# Altium PCB arm_v4.PcbDoc (part 1 of 2)
Units mil, origin at the board's own origin, x right, y up, seen from the top; angles counter-clockwise.
Board outline 3620 x 3150 mil, 4 copper layers (Top Layer, Power, GND, Bottom Layer), stack 38.234 mil thick; 65 components, 41 nets, 261 pads, 50 vias.
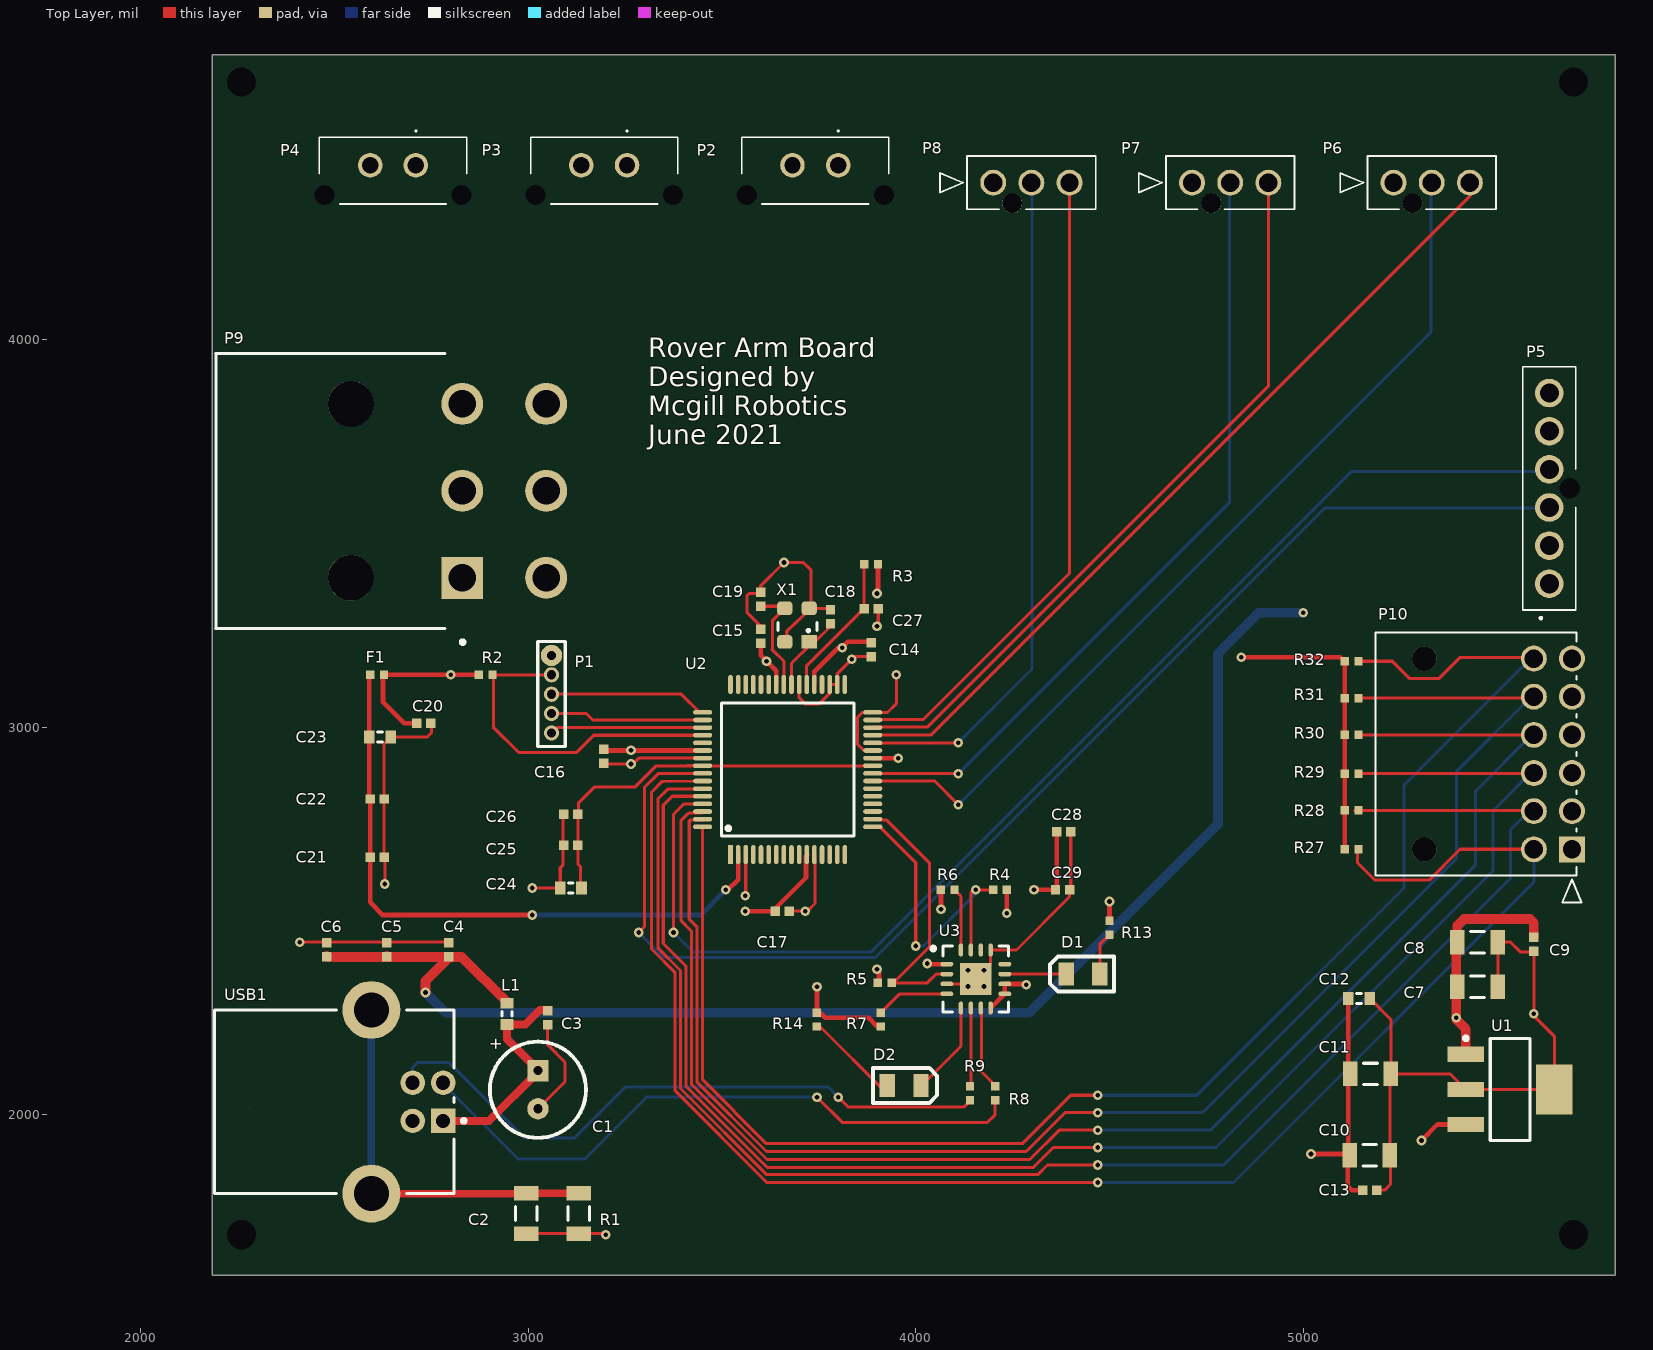
[diagram p0: Top Layer view]
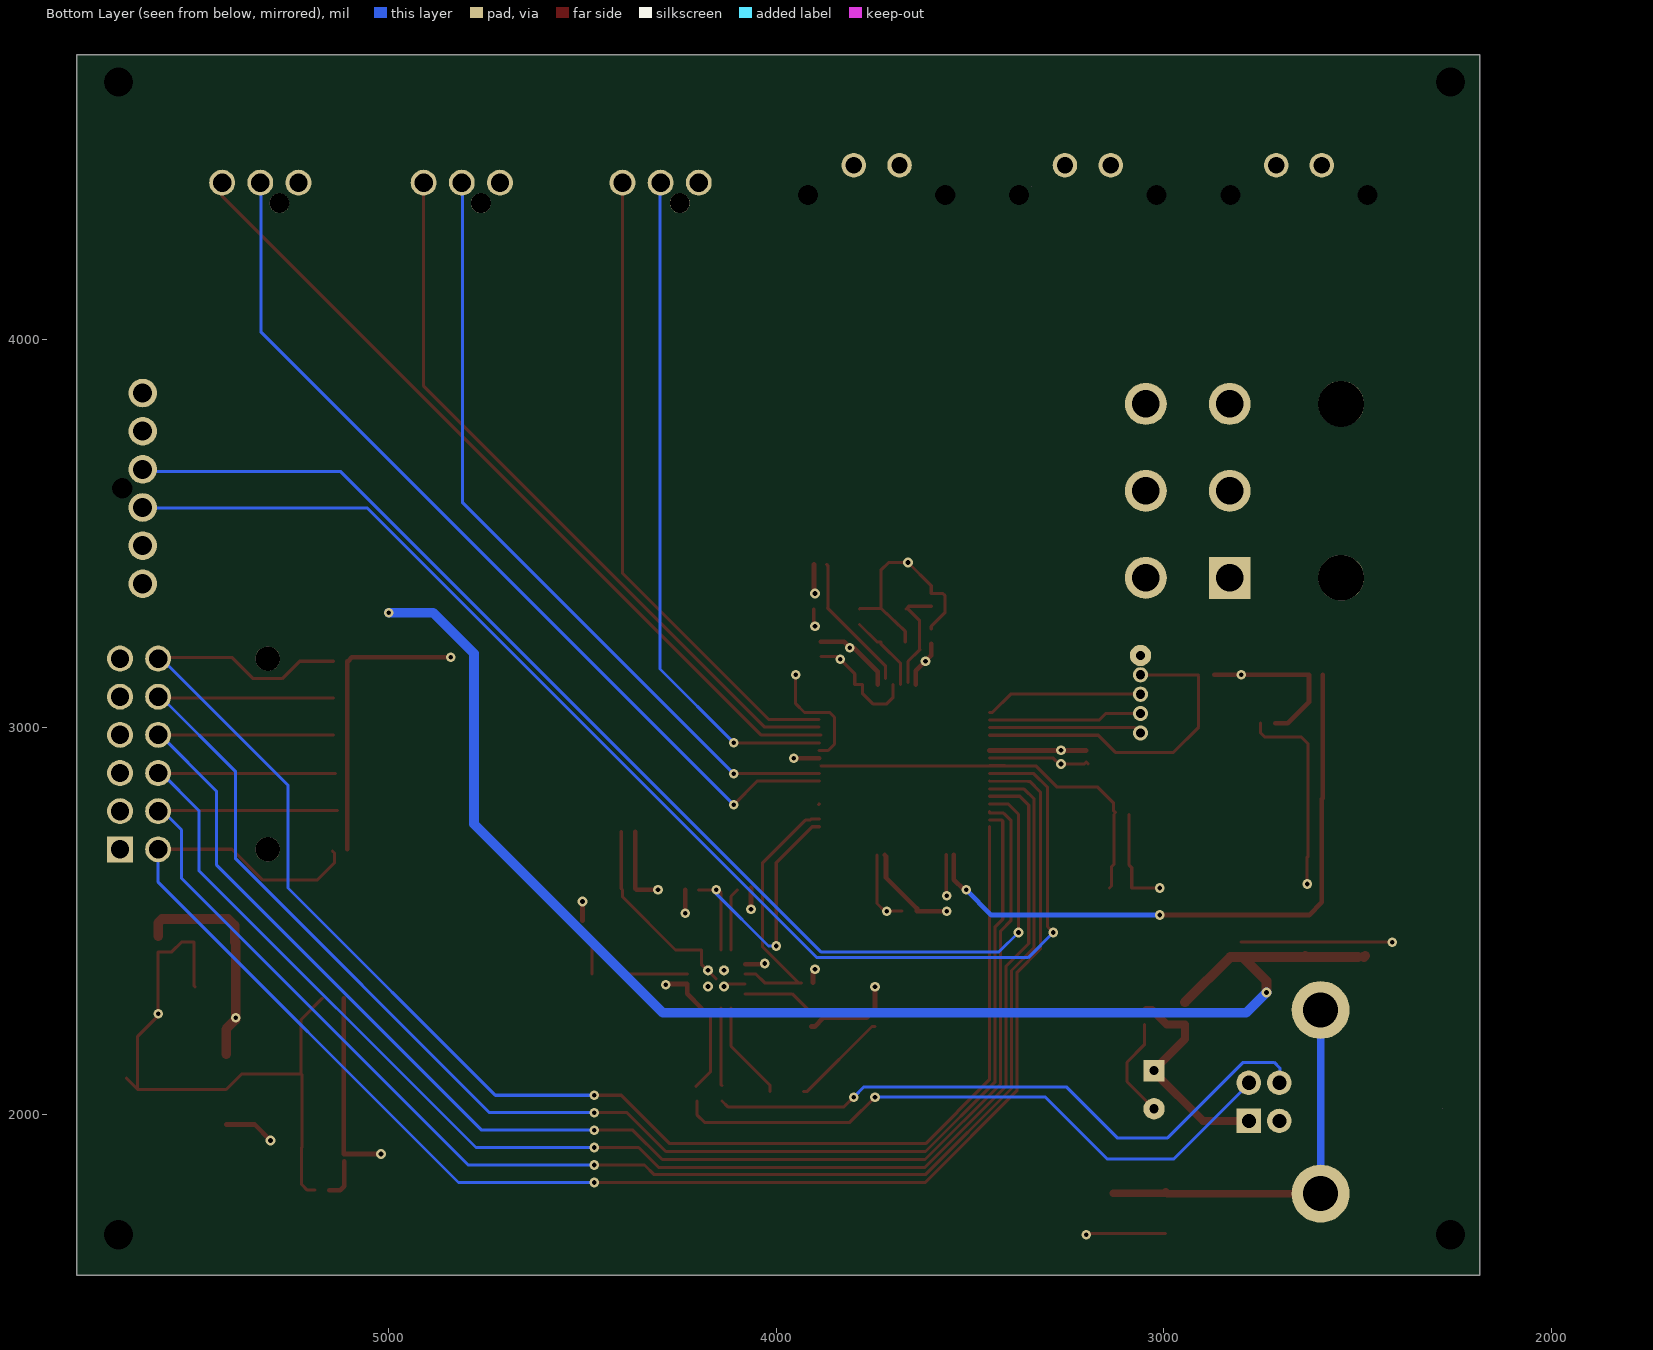
[diagram p1: Bottom Layer view, seen from below]
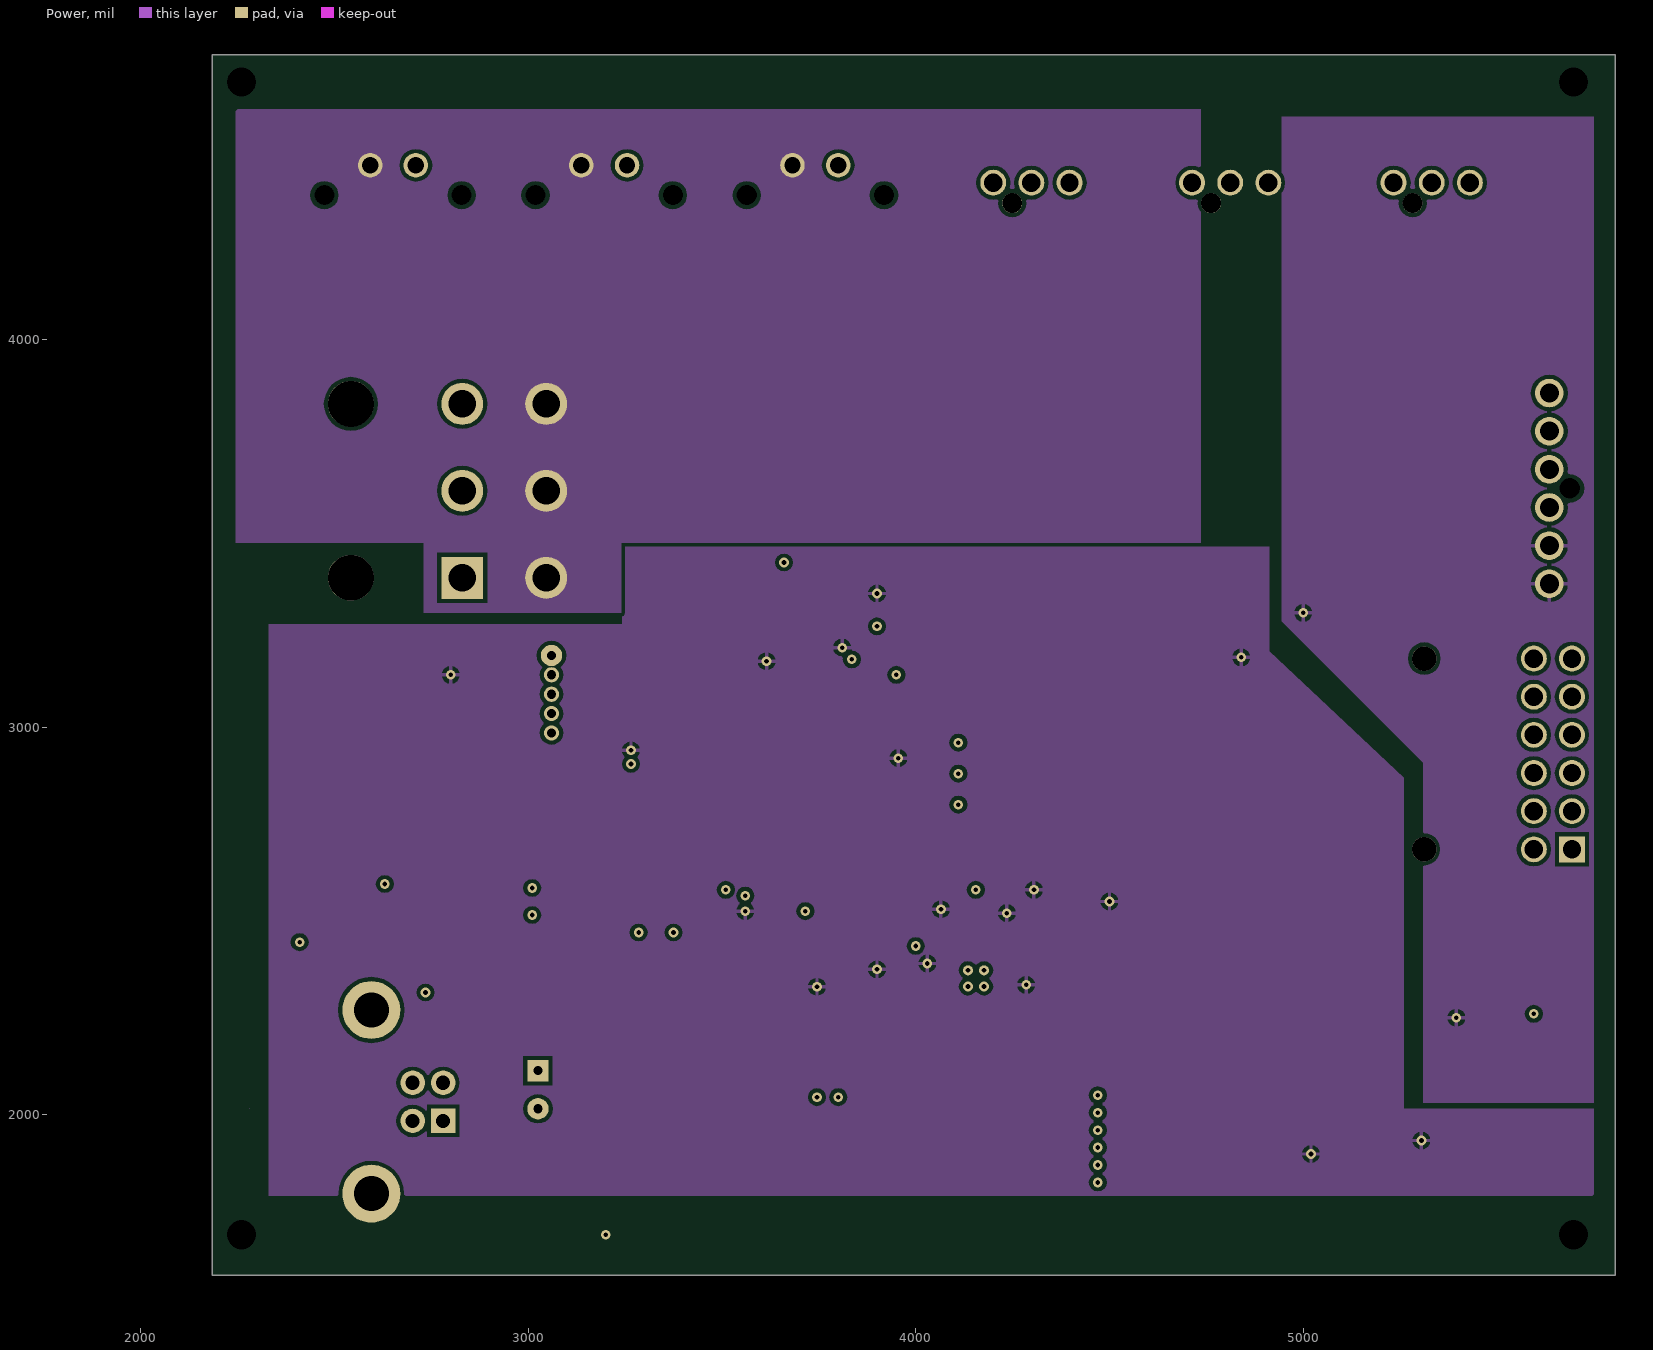
[diagram p2: Power]
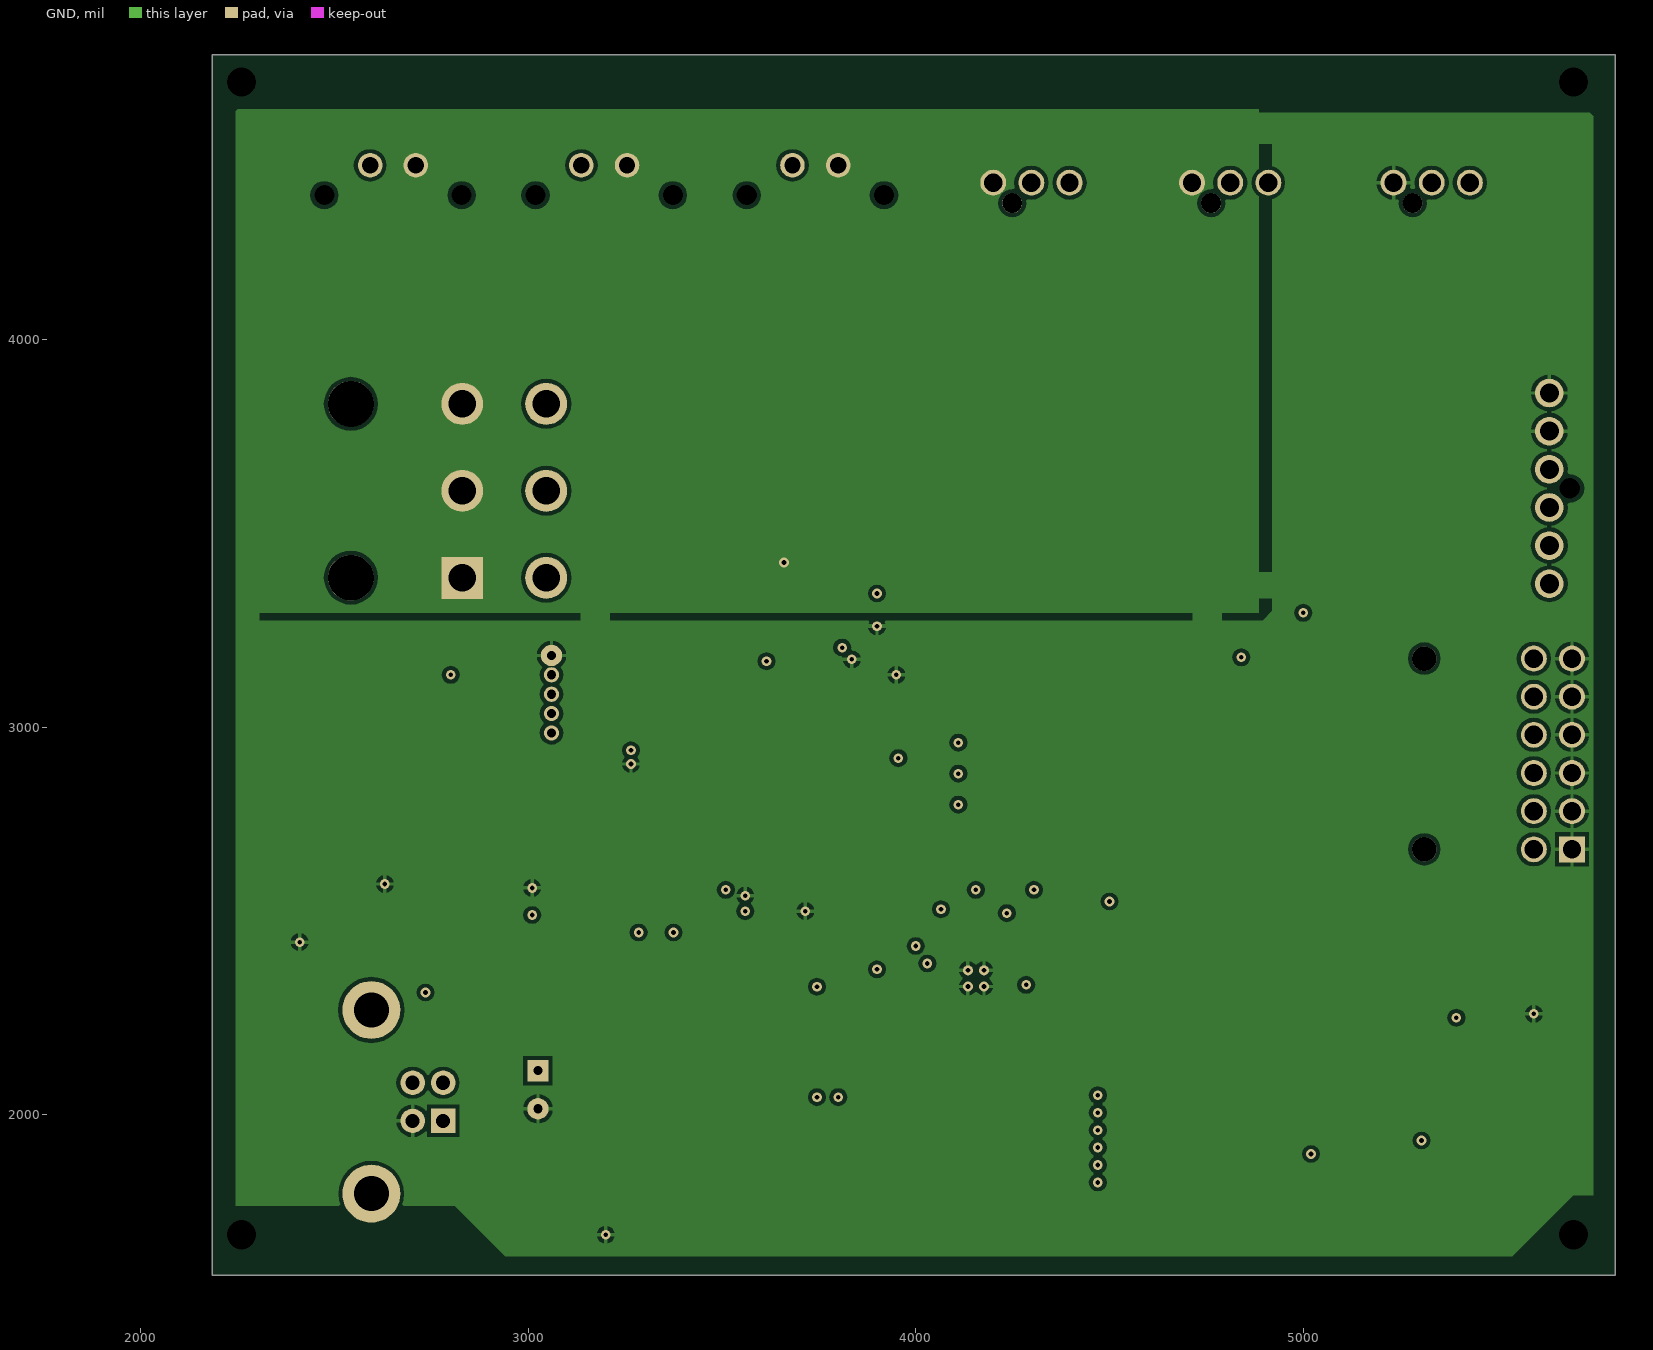
[diagram p3: GND]
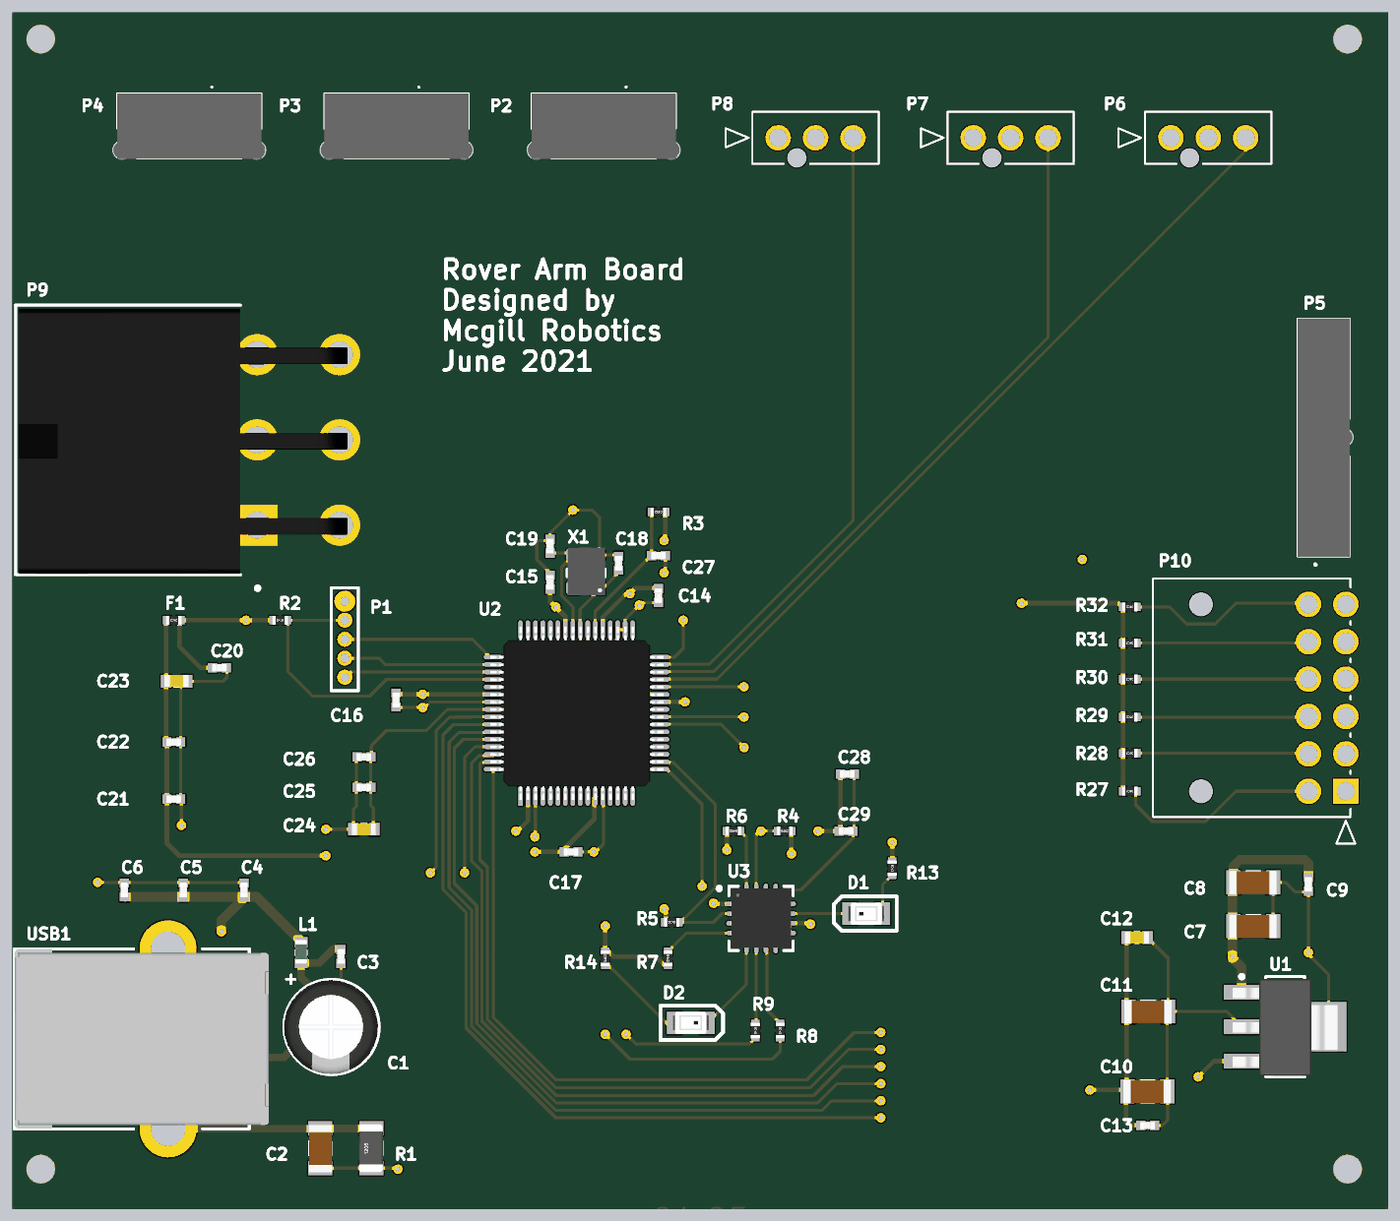
[diagram p4: 3D render of the assembled board from above, using the file's embedded part models]

## Layer stack, top to bottom
Top Solder: solder mask 0.4, Solder Resist, Dk 3.5
Top Layer: signal copper 1.4
Dielectric 2: dielectric 10, Dk 4.2
Power: signal copper 1.417
Dielectric 3: dielectric 10, Dk 4.2
GND: signal copper 1.417
Dielectric 1: dielectric 12.6, FR-4, Dk 4.8
Bottom Layer: signal copper 1.4
Bottom Solder: solder mask 0.4, Solder Resist, Dk 3.5

## Board outline
2185,4735 5805,4735 5805,1585 2185,1585
cut-out: 2280,2015
cut-out: 3340,4395

## Design rules (kind name [scope] priority, off if disabled: settings)
Clearance Clearance_7 [InNamedPolygon('OUT1_A')] p1: gap=0 ignorepadtopadclearanceinfootprint=TRUE
Clearance Clearance_6 [InNamedPolygon('OUT2_A')] p2: gap=0 ignorepadtopadclearanceinfootprint=TRUE
Clearance Clearance_5 [InNamedPolygon('OUT1_C')] p3: gap=0 ignorepadtopadclearanceinfootprint=TRUE
Clearance Clearance_4 [InNamedPolygon('OUT1_C')] p4: gap=10 ignorepadtopadclearanceinfootprint=TRUE except(0: Arc-Arc Arc-Track Arc-SMDPad Arc-THPad Arc-Via Arc-Hole Track-Track Track-SMDPad Track-THPad Track-Via Track-Hole SMDPad-Hole THPad-Hole Via-Hole Fill-Hole Poly-Hole Region-Hole Text-Hole)
Clearance Clearance_3 [InNamedPolygon('OUT2_C')] p5: gap=0 ignorepadtopadclearanceinfootprint=TRUE
Clearance Clearance_2 [InNamedPolygon('OUT2_C')] p6: gap=6 ignorepadtopadclearanceinfootprint=TRUE except(0: Arc-Hole Track-Hole SMDPad-Hole THPad-Hole Via-Hole Fill-Hole Poly-Hole Region-Hole Text-Hole)
Clearance Clearance_1 [InNamedPolygon('OUT2_C')] p7: gap=10 ignorepadtopadclearanceinfootprint=TRUE except(0: Arc-Hole Track-Hole SMDPad-Hole THPad-Hole Via-Hole Fill-Hole Poly-Hole Region-Hole Text-Hole; 6: Arc-SMDPad Track-SMDPad)
Clearance [All] p8: gap=10 ignorepadtopadclearanceinfootprint=TRUE except(0: Arc-Hole Track-Hole SMDPad-Hole THPad-Hole Via-Hole Fill-Hole Poly-Hole Region-Hole Text-Hole; 6: Arc-Arc Arc-Track Arc-SMDPad Arc-THPad Track-Track Track-SMDPad Track-THPad SMDPad-SMDPad SMDPad-THPad THPad-THPad)
HoleSize [All] p1: absolutevalues=TRUE maxlimit=150 minlimit=1 maxpercent=80.000 minpercent=20.000
MinimumSolderMaskSliver [All] p1: minsoldermaskwidth=0
PolygonConnect PolygonConnect_27 [All vs IsNamedPolygon('OUT2_B')] p1: connectstyle=Direct reliefconductorwidth=10 reliefentries=4 polygonreliefangle="90 Angle" airgapwidth=10
PolygonConnect PolygonConnect_26 [All vs IsNamedPolygon('OUT1_B')] p2: connectstyle=Direct reliefconductorwidth=10 reliefentries=4 polygonreliefangle="90 Angle" airgapwidth=10
PolygonConnect PolygonConnect_25 [All vs IsNamedPolygon('OUT1_A')] p3: connectstyle=Direct reliefconductorwidth=10 reliefentries=4 polygonreliefangle="90 Angle" airgapwidth=10
PolygonConnect PolygonConnect_24 [All vs IsNamedPolygon('OUT2_A')] p4: connectstyle=Direct reliefconductorwidth=10 reliefentries=4 polygonreliefangle="90 Angle" airgapwidth=10
PolygonConnect PolygonConnect_23 [All vs IsNamedPolygon('OUT1_C')] p5: connectstyle=Direct reliefconductorwidth=10 reliefentries=4 polygonreliefangle="90 Angle" airgapwidth=10
PolygonConnect PolygonConnect_22 [All vs IsNamedPolygon('OUT2_C')] p6: connectstyle=Direct reliefconductorwidth=10 reliefentries=4 polygonreliefangle="90 Angle" airgapwidth=10
PolygonConnect PolygonConnect_21 [All vs IsNamedPolygon('OUT2_C')] p7: connectstyle=Direct reliefconductorwidth=10 reliefentries=4 polygonreliefangle="90 Angle" airgapwidth=10
PolygonConnect PolygonConnect_20 [All vs IsNamedPolygon('Bottom Layer-OUT2_B 1')] p8: connectstyle=Direct reliefconductorwidth=10 reliefentries=4 polygonreliefangle="90 Angle" airgapwidth=10
PolygonConnect PolygonConnect_19 [All vs IsNamedPolygon('OUT2_C')] p9: connectstyle=Direct reliefconductorwidth=10 reliefentries=4 polygonreliefangle="90 Angle" airgapwidth=10
PolygonConnect PolygonConnect_18 [All vs IsNamedPolygon('OUT1_C')] p10: connectstyle=Direct reliefconductorwidth=10 reliefentries=4 polygonreliefangle="90 Angle" airgapwidth=10
PolygonConnect PolygonConnect_17 [All vs IsNamedPolygon('OUT2_B')] p11: connectstyle=Direct reliefconductorwidth=10 reliefentries=4 polygonreliefangle="90 Angle" airgapwidth=10
PolygonConnect PolygonConnect_16 [All vs IsNamedPolygon('OUT1_B')] p12: connectstyle=Direct reliefconductorwidth=10 reliefentries=4 polygonreliefangle="90 Angle" airgapwidth=10
PolygonConnect PolygonConnect_15 [All vs IsNamedPolygon('OUT1_B')] p13: thpad.connectstyle=Direct thpad.reliefconductorwidth=10 thpad.reliefentries=4 thpad.polygonreliefangle="90 Angle" thpad.airgapwidth=10 smdpad.connectstyle=Relief smdpad.reliefconductorwidth=10 smdpad.reliefentries=4 smdpad.polygonreliefangle="90 Angle" smdpad.airgapwidth=10 via.connectstyle=Direct via.reliefconductorwidth=10 via.reliefentries=4 via.polygonreliefangle="90 Angle" via.airgapwidth=10
PolygonConnect PolygonConnect_14 [All vs IsNamedPolygon('OUT1_B')] p14: thpad.connectstyle=Relief thpad.reliefconductorwidth=10 thpad.reliefentries=4 thpad.polygonreliefangle="90 Angle" thpad.airgapwidth=10 smdpad.connectstyle=Direct smdpad.reliefconductorwidth=10 smdpad.reliefentries=4 smdpad.polygonreliefangle="90 Angle" smdpad.airgapwidth=10 via.connectstyle=Relief via.reliefconductorwidth=10 via.reliefentries=4 via.polygonreliefangle="90 Angle" via.airgapwidth=10
PolygonConnect PolygonConnect_13 [All vs IsNamedPolygon('Power +24V')] p15: connectstyle=Direct reliefconductorwidth=10 reliefentries=4 polygonreliefangle="90 Angle" airgapwidth=10
PolygonConnect PolygonConnect_12 [All vs IsNamedPolygon('Power +3.3V')] p16: connectstyle=Relief reliefconductorwidth=10 reliefentries=4 polygonreliefangle="90 Angle" airgapwidth=10
PolygonConnect PolygonConnect_11 [All vs IsNamedPolygon('Power +5V')] p17: connectstyle=Relief reliefconductorwidth=10 reliefentries=4 polygonreliefangle="90 Angle" airgapwidth=10
PolygonConnect PolygonConnect_10 [All vs IsNamedPolygon('GND +24V')] p18: connectstyle=Direct reliefconductorwidth=10 reliefentries=4 polygonreliefangle="90 Angle" airgapwidth=10
PolygonConnect PolygonConnect_9 [All vs IsNamedPolygon('GND Main')] p19: connectstyle=Relief reliefconductorwidth=10 reliefentries=4 polygonreliefangle="90 Angle" airgapwidth=10
PolygonConnect PolygonConnect_8 [All vs IsNamedPolygon('GND Main')] p20: connectstyle=Relief reliefconductorwidth=10 reliefentries=4 polygonreliefangle="90 Angle" airgapwidth=10
PolygonConnect PolygonConnect_7 [All vs IsNamedPolygon('GND +24V')] p21: connectstyle=Direct reliefconductorwidth=10 reliefentries=4 polygonreliefangle="90 Angle" airgapwidth=10
PolygonConnect PolygonConnect_6 [All vs IsNamedPolygon('Power +5V')] p22: connectstyle=Relief reliefconductorwidth=10 reliefentries=4 polygonreliefangle="90 Angle" airgapwidth=10
PolygonConnect PolygonConnect_5 [All vs IsNamedPolygon('GND Main')] p23: connectstyle=Relief reliefconductorwidth=10 reliefentries=4 polygonreliefangle="90 Angle" airgapwidth=10
PolygonConnect PolygonConnect_4 [All vs IsNamedPolygon('GND +24V')] p24: connectstyle=Direct reliefconductorwidth=10 reliefentries=4 polygonreliefangle="90 Angle" airgapwidth=10
PolygonConnect PolygonConnect_3 [All vs IsNamedPolygon('GND +24V')] p25: connectstyle=Direct reliefconductorwidth=10 reliefentries=4 polygonreliefangle="90 Angle" airgapwidth=10
PolygonConnect PolygonConnect_2 [All vs IsNamedPolygon('GND Main')] p26: connectstyle=Direct reliefconductorwidth=10 reliefentries=4 polygonreliefangle="90 Angle" airgapwidth=10
PolygonConnect PolygonConnect_1 [All vs IsNamedPolygon('Power +24V')] p27: connectstyle=Direct reliefconductorwidth=10 reliefentries=4 polygonreliefangle="90 Angle" airgapwidth=10
PolygonConnect [All] p28: connectstyle=Relief reliefconductorwidth=10 reliefentries=4 polygonreliefangle="90 Angle" airgapwidth=10
RoutingVias [All] p1: holewidth=28 width=50 viastyle="Through Hole" minholewidth=10 minwidth=25 maxholewidth=50 maxwidth=150
SilkToSilkClearance [All] p1: silktosilkclearance=0
SilkToSolderMaskClearance [IsPad] p1: minsilkscreentomaskgap=0 clearancetoexposedcopper=TRUE
SolderMaskExpansion [All] p1: expansion=4
Width [All] p1: maxlimit=100 minlimit=6 preferedwidth=10 toplayer_prefwidth=8 midlayer1_minwidth=10 midlayer1_maxwidth=10 midlayer2_minwidth=10 midlayer2_maxwidth=10 bottomlayer_prefwidth=8 minimp=50.000000 maximp=50.000000 favimp=50.000000
26 further rules are at their usual default settings.

## Components (designator, comment, footprint, x,y, rotation, side; value= is the part's Value field where it differs from the comment)
C1 "100uF" CapAlu6.3mmx12.5mm 3025,2064.21 r90 top
C2 "10nF" CAP_1206 2995,1745 r90 top
C3 "10nF" CAP_0402_M 3050,2250 r90 top
C4 "100nF" CAP_0402_M 2795,2425 r270 top
C5 "2.2uF" CAP_0402_M 2635,2425 r270 top
C6 "2.2uF" CAP_0402_M 2480,2425 r270 top
C7 "100uF" CAP_1206 5450,2330 r0 top
C8 "100uF" CAP_1206 5450,2445 r0 top
C9 "1uF" CAP_0402_M 5595,2440 r90 top
C10 "100uF" CAP_1206 5171.65,1895 r0 top
C11 "100uF" CAP_1206 5173.82,2105 r0 top
C12 "10uF" CAP_0603 5143.82,2300 r0 top
C13 "10nF" CAP_0402_M 5171.89,1805 r180 top
C14 "100nF" CAP_0402_M 3885,3200 r90 top
C15 "100nF" CAP_0402_M 3600,3235 r270 top
C16 "10nF" CAP_0402_M 3195,2925 r90 top
C17 "100nF" CAP_0402_M 3655,2525 r180 top
C18 "13pF" CAP_0402_M 3780,3285 r270 top
C19 "13pF" CAP_0402_M 3600,3330 r270 top
C20 "100nF" CAP_0402_M 2730,3010 r180 top
C21 "10nF" CAP_0402_M 2610,2664.48 r180 top
C22 "100nF" CAP_0402_M 2610,2814.48 r180 top
C23 "10uF" CAP_0603 2617.44,2974.48 r180 top
C24 "2.2uF" CAP_0603 3110,2585 r0 top
C25 "1uF" CAP_0402_M 3110,2695 r0 top
C26 "100nF" CAP_0402_M 3110,2775 r0 top
C27 "100nF" CAP_0402_M 3885,3305 r180 top
C28 "100nF" CAP_0402_M 4381.89,2730 r180 top
C29 "100nF" CAP_0402_M 4378.78,2580 r180 top
D1 "Led Red" "TOPLED 0805" 4431.69,2362.8 r180 top
D2 "Led Red" "TOPLED 0805" 3970,2075 r0 top
F1 "550mA" RES_0402_M 2610,3135 r180 top
L1 "200R" IND_0603 2945,2260 r90 top
P1 "MHDR1X5" MHDR1X5 3060,3185 r270 top
P2 "BDC_A" 436500227 3800,4450 r0 top
P3 "BDC_B" 436500227 3255,4450 r0 top
P4 "BDC_C" 436500227 2710,4450 r0 top
P5 "ENC A&B" 1053091106 5635,3370 r90 top
P6 "BDC_A" CON_1053091203 5233.15,4405 r0 top
P7 "BDC_B" CON_1053091203 4713.15,4405 r0 top
P8 "BDC_C" CON_1053091203 4200,4405 r0 top
P9 "76825-0006" Molex_76825-0006_0 2495,3610 r270 top
P10 "Limit Switch" CON_1053141112 5693.43,2684.72 r270 top
R1 "1M" RES_1206 3130,1745 r90 top
R2 "10k" RES_0402_M 2890,3135 r0 top
R3 "10k" RES_0402_M 3885,3420 r180 top
R4 "10k" RES_0402_M 4217.28,2580 r0 top
R5 "10k" RES_0402_M 3920,2340 r180 top
R6 "10k" RES_0402_M 4082.28,2580 r180 top
R7 "10k" RES_0402_M 3910,2245 r270 top
R8 "27" RES_0402_M 4205,2055 r90 top
R9 "27" RES_0402_M 4140,2055 r90 top
R13 "120" RES_0402_M 4500,2482.28 r90 top
R14 "120" RES_0402_M 3745,2245 r90 top
R27 "150" RES_0402_M 5125,2685 r180 top
R28 "150" RES_0402_M 5125,2785 r180 top
R29 "150" RES_0402_M 5125,2880 r180 top
R30 "150" RES_0402_M 5125,2980 r180 top
R31 "150" RES_0402_M 5125,3075 r180 top
R32 "150" RES_0402_M 5125,3170 r180 top
U1 "MCP1825S-3302E/DB" SOT230P700X180-4N 5533.82,2065 r0 top
U2 "TM4C123GH6PMI" TSQFP50P1200X1200X120-64N 3450.04,2742.87 r90 top
U3 "FT230XQ" QFN65P400X400X80_HS-17N 4155,2350 r0 top
USB1 "USB type-B jack" USB2.5-2H4E 2741.06,2032.99 r180 top
X1 "CRYSTAL 16MHZ" CRYSTAL_3.2x2.5 3725,3220 r180 top

## Footprints (in the part's own frame and the unit in brackets; to place one, negate y for a bottom-side part, rotate by r counter-clockwise, add the part's x,y. Pads: shape width x height; smd on the part's side, far side on the other; paste and mask are expansions set on the pad)
436500227 [mm]
  round 1.605 hole 1.07: 1(0,0) 2(-3,0)
  round 0.66 hole 1.32 unplated: 3(3,-1.96) 4(-6,-1.96)
  silkscreen extent -6.32,-2.54 3.32,2.3, body extent -6.56,-2.54 3.56,1.83, height 10.25
1053091106 [mm]
  round 1.875 hole 1.25: 1(0,0) 2(2.5,0) 3(5,0) 4(7.5,0) 5(10,0) 6(12.5,0)
  round 0.675 hole 1.35 unplated: MH1(6.25,-1.34)
  silkscreen extent -2.3,-1.74 14.22,1.74, body extent -1.72,-1.91 14.22,1.74, height 10.81
CAP_0402_M [mm] "Chip Capacitor, 2-Leads, Body 1.00x0.50mm, IPC Medium Density"
  rect 0.62x0.62 smd: 1(-0.46,0) 2(0.46,0)
  body extent -0.5,-0.26 0.5,0.27, height 0.36
CAP_0603 [mm] "Chip Capacitor, 2-Leads, Body 1,6x0,8mm, IPC High Density"
  rect 0.7x0.85 smd: 1(-0.7,0) 2(0.7,0)
  silkscreen extent -0.15,-0.33 0.15,0.33, body extent -0.8,-0.42 0.8,0.38, height 0.7
CAP_1206 [mm] "Chip Capacitor, 2-Leads, Body 3,1x1,6mm, IPC High Density"
  rect 0.95x1.6 smd: 1(-1.325,0) 2(1.325,0)
  silkscreen extent -0.45,-0.7 0.45,0.7, body extent -1.63,-0.82 1.57,0.78, height 1.6
CapAlu6.3mmx12.5mm [mm] "Capacitor Aluminum 6.3mm OD"
  rect 1.4x1.4 hole 0.6: 1(1.25,0)
  round 1.4 hole 0.6: 2(-1.25,0)
  silkscreen extent -3.15,-3.15 3.15,3.15, body extent -3.15,-3.11 3.15,3.19, height 12
CON_1053091203 [mm]
  round 1.7 hole 1.2 mask+0.076: 1(0,0) 2(2.5,0) 3(5,0)
  round 1.3 hole 1.3 unplated mask+0.076: 4(1.25,-1.34)
  silkscreen extent -3.5,-1.74 6.72,1.74, body extent 0,0 0.25,0.25, height 0.25
CON_1053141112 [mm]
  rect 1.7x1.7 hole 1.2 mask+0.076: 1(0,0)
  round 1.7 hole 1.2 mask+0.076: 2(-2.5,0) 3(-5,0) 4(-7.5,0) 5(-10,0) 6(-12.5,0) 7(0,-2.5) 8(-2.5,-2.5) 9(-5,-2.5) 10(-7.5,-2.5) 11(-10,-2.5) 12(-12.5,-2.5)
  round 1.6 hole 1.6 unplated mask+0.076: 13(0,-9.68) 14(-12.5,-9.68)
  silkscreen extent -14.22,-12.88 3.5,0.64, body extent 0,0 0.25,0.25, height 0.25
CRYSTAL_3.2x2.5 [mm]
  rect 1x0.9 smd: 1(0,0)
  rrect50% 1x0.9 smd: 2(0,-2.2) 3(1.6,-2.2) 4(1.6,0)
  silkscreen extent -0.51,-1.27 2.03,-0.69, body extent -0.5,-2.7 2,0.5, height 0.93
IND_0603 [mm]
  rect 0.7x0.85 smd: 1(-0.7,0) 2(0.7,0)
  silkscreen extent -0.15,-0.32 0.15,0.33, body extent -0.74,-0.4 0.86,0.4, height 0.95
MHDR1X5 [mm] "Connector; Header; 5 Position"
  round 1.4 hole 0.6: 1(0,0)
  round 1 hole 0.6: 2(1.27,0) 3(2.54,0) 4(3.81,0) 5(5.08,0)
  silkscreen extent -0.9,-0.9 5.98,0.9
Molex_76825-0006_0 [mm]
  rect 2.75x2.75 hole 1.8 paste-1000 mask+0: 1(5.705,8.5)
  round 2.75 hole 1.8 paste-1000 mask+0: 2(0.005,8.5) 3(-5.695,8.5) 4(5.705,14) 5(0.005,14) 6(-5.695,14)
  round 3 hole 3 unplated paste-1000 mask+0: ""(-5.695,1.2) ""(5.695,1.2)
  silkscreen extent -9,-7.68 10.05,8.65, body extent -9.1,-7.75 9.1,15.48, height 0.25
QFN65P400X400X80_HS-17N [mm] "QFN, 16-Leads, Body 4.00x4.00mm, Pitch 0.65mm, Thermal Pad 2.08x2.08mm, IPC Medium Density"
  oval 0.85x0.3 smd: 1(-1.9,0.975) 2(-1.9,0.325) 3(-1.9,-0.325) 4(-1.9,-0.975) 9(1.9,-0.975) 10(1.9,-0.325) 11(1.9,0.325) 12(1.9,0.975)
  oval 0.3x0.85 smd: 5(-0.975,-1.9) 6(-0.325,-1.9) 7(0.325,-1.9) 8(0.975,-1.9) 13(0.975,1.9) 14(0.325,1.9) 15(-0.325,1.9) 16(-0.975,1.9)
  round 0.66 hole 0.305: 17(-0.516,-0.493) 17(-0.516,0.567) 17(0.538,-0.493) 17(0.538,0.567)
  rect 2.08x2.08 smd: 17(0,0)
  silkscreen extent -2.92,-2.15 2.15,2.15, body extent -2,-2 2,2, height 0.92
RES_0402_M [mm] "Chip Resistor, 2-Leads, Body 1.00x0.50mm, IPC Medium Density"
  rect 0.55x0.55 smd: 1(-0.45,0) 2(0.45,0)
  body extent -0.52,-0.3 0.52,0.3, height 0.34
RES_1206 [mm] "Chip Resistor 2-Leads, Body 3,1x1,6mm, IPC High Density"
  rect 0.95x1.6 smd: 1(-1.325,0) 2(1.325,0)
  silkscreen extent -0.45,-0.7 0.45,0.7, body extent -1.59,-0.76 1.61,0.84, height 1
SOT230P700X180-4N [mm] "SOT223, 4-Leads, Body 6,7x7,3mm (max), Pitch 2,30mm, IPC Medium Density"
  rect 2.4x1 smd: 1(-2.9,2.3) 2(-2.9,0) 3(-2.9,-2.3)
  rect 2.4x3.3 smd: 4(2.9,0)
  silkscreen extent -3.02,-3.35 1.3,3.47, body extent -3.5,-3.3 3.5,3.2, height 1.69
"TOPLED 0805" [mm]
  rect 1x1.5 smd: 1(-1.1,0) 2(1.1,0)
  silkscreen extent -2.03,-1.14 2.16,1.14, body extent -1.2,-0.74 1.2,0.76, height 1.45
TSQFP50P1200X1200X120-64N [mm] "TSQFP, 64-Leads, Body 12,0x12,0mm (max), Pitch 0,50mm, IPC Medium Density"
  rect 1.25x0.3 smd: 1(-1.825,-1.825)
  oval 1.25x0.3 smd: 2(-1.825,-2.325) 3(-1.825,-2.825) 4(-1.825,-3.325) 5(-1.825,-3.825) 6(-1.825,-4.325) 7(-1.825,-4.825) 8(-1.825,-5.325) 9(-1.825,-5.825) 10(-1.825,-6.325) 11(-1.825,-6.825) 12(-1.825,-7.325) 13(-1.825,-7.825) 14(-1.825,-8.325) 15(-1.825,-8.825) 16(-1.825,-9.325) 33(9.325,-9.325) 34(9.325,-8.825) 35(9.325,-8.325) 36(9.325,-7.825) 37(9.325,-7.325) 38(9.325,-6.825) 39(9.325,-6.325) 40(9.325,-5.825) 41(9.325,-5.325) 42(9.325,-4.825) 43(9.325,-4.325) 44(9.325,-3.825) 45(9.325,-3.325) 46(9.325,-2.825) 47(9.325,-2.325) 48(9.325,-1.825)
  oval 0.3x1.25 smd: 17(0,-11.15) 18(0.5,-11.15) 19(1,-11.15) 20(1.5,-11.15) 21(2,-11.15) 22(2.5,-11.15) 23(3,-11.15) 24(3.5,-11.15) 25(4,-11.15) 26(4.5,-11.15) 27(5,-11.15) 28(5.5,-11.15) 29(6,-11.15) 30(6.5,-11.15) 31(7,-11.15) 32(7.5,-11.15) 49(7.5,0) 50(7,0) 51(6.5,0) 52(6,0) 53(5.5,0) 54(5,0) 55(4.5,0) 56(4,0) 57(3.5,0) 58(3,0) 59(2.5,0) 60(2,0) 61(1.5,0) 62(1,0) 63(0.5,0) 64(0,0)
  silkscreen extent -0.6,-9.93 8.1,-1.23, body extent -2.05,-11.38 9.53,0.2, height 1
USB2.5-2H4E [mm] "Connector; USB1.1, Type B, Thru-Hole; 4 Position; Right Angle"
  rect 1.6x1.6 hole 0.92: 1(-1,1.25)
  round 1.6 hole 0.92: 2(-1,-1.25) 3(1,-1.25) 4(1,1.25)
  round 3.8 hole 2.3: 5(3.71,6.02) 6(3.71,-6.02)
  silkscreen extent -2.48,-6.02 13.99,6.02, body extent -3.03,-6 13.97,6, height 10.9

## Part data
C1: library part 100uF_35v_6.3x12.5, "Capacitor 35v 100uF 6.3mm", Capacitance=100µF, ESR (Equivalent Series Resistance)=-, Lifetime @ Temp.="5000 Hrs @ 105°C", Manufacturer=Nichicon, Manufacturer Part Number=UHV1V101MED, Operating Temperature="-40°C ~ 105°C", Package / Case="Radial, Can", Ripple Current="220mA @ 120Hz", Supplier Part Number 1=493-13394-ND, Tolerance=±20%, Voltage Rating=35V, Applications="General Purpose", Category=Capacitors, ComponentLink1Description=http://nichicon-us.com/english/products/pdfs/e-uhv.pdf, ComponentLink1URL=http://nichicon-us.com/english/products/pdfs/e-uhv.pdf, Height - Seated (Max)="0.492\" (12.50mm)", Impedance="100 mOhm", Lead Spacing="0.098\" (2.50mm)", Mounting Type="Through Hole", Packaging=Bulk, Polarization=Polar, Pricing 1="1=0.46, 10=0.32, 25=0.262, 50=0.224, 100=0.1919, 250=0.15992, 500=0.14394, 1000=0.12155, 2500=0.11515 (CAD)", RoHS="RoHS Compliant", Size / Dimension="0.248\" Dia (6.30mm)", Stock 1=5561, Supplier 1=Digi-Key, Surface Mount Land Size=-
C2: library part 10nF_500V_1206, "CAP CER 10000PF 500V X7R 1206", Capacitance=10000pF, Manufacturer="Samsung Electro-Mechanics America, Inc", Manufacturer Part Number=CL31B103KGFNNNE, Operating Temperature="-55°C ~ 125°C", Package / Case="1206 (3216 Metric)", Ratings=-, Supplier Part Number 1=1276-3076-1-ND, Temperature Coefficient=X7R, Tolerance=±10%, Voltage - Rated=500V, Applications="General Purpose", Category=Capacitors, ComponentLink1Description=http://www.samsungsem.com/kr/front/downloadcms.do?path=/kr/support/product-search/mlcc/__icsFiles/afieldfile/2014/11/05&fileName=S_CL31B103KGFNNNE.pdf, ComponentLink1URL=http://www.samsungsem.com/kr/front/downloadcms.do?path=/kr/support/product-search/mlcc/__icsFiles/afieldfile/2014/11/05&fileName=S_CL31B103KGFNNNE.pdf, Features=-, Height - Seated (Max)=-, Lead Spacing=-, Lead Style=-, Mounting Type="Surface Mount, MLCC", Packaging="Cut Tape (CT)", Pricing 1="1=0.34, 10=0.28, 25=0.192, 100=0.1398, 500=0.09266, 1000=0.08216 (CAD)", RoHS="RoHS Compliant", Size / Dimension="0.126\" L x 0.063\" W (3.20mm x 1.60mm)", Stock 1=9075, Supplier 1=Digi-Key, Thickness (Max)="0.055\" (1.40mm)"
C3 C13 C16 C21: library part 10nF_50V_0402, "CAP CER 10000PF 50V 10% X7R 0402", Capacitance=10000pF, Manufacturer=Kemet, Manufacturer Part Number=C0402C103K5RACTU, Operating Temperature="-55°C ~ 125°C", Package / Case="0402 (1005 Metric)", Ratings=-, Supplier Part Number 1=399-3066-1-ND, Temperature Coefficient=X7R, Tolerance=±10%, Voltage - Rated=50V, Applications="General Purpose", Category=Capacitors, ComponentLink1Description=http://www.kemet.com/docfinder?Partnumber=C0402C103K5RACTU, ComponentLink1URL=http://www.kemet.com/docfinder?Partnumber=C0402C103K5RACTU, Features=-, Height - Seated (Max)=-, Lead Spacing=-, Lead Style=-, Mounting Type="Surface Mount, MLCC", Packaging="Cut Tape (CT)", Pricing 1="1=0.14, 10=0.037, 25=0.026, 50=0.0198, 100=0.0166, 250=0.01364, 1000=0.00893, 2500=0.00804, 5000=0.00744 (CAD)", RoHS="RoHS Compliant", Size / Dimension="0.039\" L x 0.020\" W (1.00mm x 0.50mm)", Stock 1=3556921, Supplier 1=Digi-Key, Thickness (Max)="0.022\" (0.55mm)"
C4 C14 C15 C17 C20 C22 C26 C27 C28 C29: library part 100nF_50V_0402, "CAP CER 100NF 50V 20% X5R 0402", Capacitance=0.1µF, Manufacturer="TDK Corporation", Manufacturer Part Number=C1005X5R1H104M050BB, Operating Temperature="-55°C ~ 85°C", Package / Case="0402 (1005 Metric)", Ratings=-, Supplier Part Number 1=445-5943-1-ND, Temperature Coefficient=X5R, Tolerance=±20%, Voltage - Rated=50V, Applications="General Purpose", Category=Capacitors, ComponentLink1Description=http://product.tdk.com/en/catalog/datasheets/mlcc_commercial_general_en.pdf, ComponentLink1URL=http://product.tdk.com/en/catalog/datasheets/mlcc_commercial_general_en.pdf, Features=-, Height - Seated (Max)=-, Lead Spacing=-, Lead Style=-, Mounting Type="Surface Mount, MLCC", Packaging="Cut Tape (CT)", Pricing 1="1=0.18, 10=0.122, 100=0.0579, 250=0.04872, 500=0.0408, 1000=0.03348, 5000=0.02831 (CAD)", RoHS="RoHS Compliant", Size / Dimension="0.039\" L x 0.020\" W (1.00mm x 0.50mm)", Stock 1=218263, Supplier 1=Digi-Key, Thickness (Max)="0.022\" (0.55mm)"
C5 C6: library part 2.2uF_10V_0402, "CAP CER 2.2UF 10V 20% X5R 0402", Capacitance=2.2µF, Manufacturer="Taiyo Yuden", Manufacturer Part Number=LMK105BJ225MV-F, Operating Temperature="-55°C ~ 85°C", Package / Case="0402 (1005 Metric)", Ratings=-, Supplier Part Number 1=587-3153-1-ND, Temperature Coefficient=X5R, Tolerance=±20%, Voltage - Rated=10V, Applications="General Purpose", Category=Capacitors, ComponentLink1Description=http://www.yuden.co.jp/ut/product/category/capacitor/LMK105BJ225MV-F.pdf, ComponentLink1URL=http://www.yuden.co.jp/ut/product/category/capacitor/LMK105BJ225MV-F.pdf, Features=-, Height - Seated (Max)=-, Lead Spacing=-, Lead Style=-, Mounting Type="Surface Mount, MLCC", Packaging="Cut Tape (CT)", Pricing 1="1=0.26, 10=0.173, 50=0.105, 100=0.0881, 250=0.07132, 500=0.0629, 1000=0.05348, 2500=0.04928, 5000=0.04509 (CAD)", RoHS="RoHS Compliant", Size / Dimension="0.039\" L x 0.020\" W (1.00mm x 0.50mm)", Stock 1=258065, Supplier 1=Digi-Key, Thickness (Max)="0.022\" (0.55mm)"
C7 C8 C10 C11: library part 100uF_6.3v_1206_X5R, "CAP CER 100UF 6.3V X5R 1206", Capacitance=100µF, Manufacturer="Murata Electronics North America", Manufacturer Part Number=GRM31CR60J107ME39L, Operating Temperature="-55°C ~ 85°C", Package / Case="1206 (3216 Metric)", Ratings=-, Supplier Part Number 1=490-4539-1-ND, Temperature Coefficient=X5R, Tolerance=±20%, Voltage - Rated=6.3V, Applications="General Purpose", Category=Capacitors, ComponentLink1Description=http://www.murata.com/~/media/webrenewal/support/library/catalog/products/capacitor/mlcc/c02e.pdf, ComponentLink1URL=http://www.murata.com/~/media/webrenewal/support/library/catalog/products/capacitor/mlcc/c02e.pdf, Features=-, Height - Seated (Max)=-, Lead Spacing=-, Lead Style=-, Mounting Type="Surface Mount, MLCC", Packaging="Cut Tape (CT)", Pricing 1="1=1.23, 10=1.048, 50=0.771, 100=0.6128, 250=0.51396, 500=0.46456, 1000=0.42502 (CAD)", RoHS="RoHS Compliant", Size / Dimension="0.126\" L x 0.063\" W (3.20mm x 1.60mm)", Stock 1=450179, Supplier 1=Digi-Key, Thickness (Max)="0.071\" (1.80mm)"
C9 C25: library part 1uF_25V_0402, "CAP CER 1UF 25V 10% X5R 0402", Capacitance=1µF, Manufacturer="TDK Corporation", Manufacturer Part Number=C1005X5R1E105K050BC, Operating Temperature="-55°C ~ 85°C", Package / Case="0402 (1005 Metric)", Ratings=-, Supplier Part Number 1=445-9066-1-ND, Temperature Coefficient=X5R, Tolerance=±10%, Voltage - Rated=25V, Applications="General Purpose", Category=Capacitors, ComponentLink1Description=http://product.tdk.com/en/catalog/datasheets/mlcc_commercial_general_en.pdf, ComponentLink1URL=http://product.tdk.com/en/catalog/datasheets/mlcc_commercial_general_en.pdf, Features=-, Height - Seated (Max)=-, Lead Spacing=-, Lead Style=-, Mounting Type="Surface Mount, MLCC", Packaging="Cut Tape (CT)", Pricing 1="1=0.27, 10=0.185, 100=0.0878, 250=0.074, 500=0.06196, 1000=0.05087, 5000=0.04301 (CAD)", RoHS="RoHS Compliant", Size / Dimension="0.039\" L x 0.020\" W (1.00mm x 0.50mm)", Stock 1=310467, Supplier 1=Digi-Key, Thickness (Max)="0.022\" (0.55mm)"
C12 C23: library part 10uF_10V_0603, "CAP CER 10UF 10V 20% X5R 0603", Capacitance=10µF, Manufacturer="Taiyo Yuden", Manufacturer Part Number=LMK107BBJ106MAHT, Operating Temperature="-55°C ~ 85°C", Package / Case="0603 (1608 Metric)", Ratings=AEC-Q200, Supplier Part Number 1=587-3412-1-ND, Temperature Coefficient=X5R, Tolerance=±20%, Voltage - Rated=10V, Applications=Automotive, Category=Capacitors, ComponentLink1Description=http://www.yuden.co.jp/productdata/catalog/en/mlcc01_hq_e.pdf, ComponentLink1URL=http://www.yuden.co.jp/productdata/catalog/en/mlcc01_hq_e.pdf, Features=-, Height - Seated (Max)=-, Lead Spacing=-, Lead Style=-, Mounting Type="Surface Mount, MLCC", Packaging="Cut Tape (CT)", Pricing 1="1=0.5, 10=0.437, 50=0.266, 100=0.2189, 250=0.17516, 500=0.15952, 1000=0.14107 (CAD)", RoHS="RoHS Compliant", Size / Dimension="0.063\" L x 0.031\" W (1.60mm x 0.80mm)", Stock 1=90195, Supplier 1=Digi-Key, Thickness (Max)="0.035\" (0.90mm)"
C18 C19: library part 13pF_50V_0402, "CAP CER 13PF 50V 5% NP0 0402", Manufacturer="Samsung Electro-Mechanics America, Inc", Manufacturer Part Number=CL05C130JB5NNNC, Operating Temperature="-55°C ~ 125°C", Package / Case="0402 (1005 Metric)", Ratings=-, Supplier Part Number 1=1276-1642-1-ND, Temperature Coefficient="C0G, NP0", Tolerance=±5%, Voltage - Rated=50V, Applications="General Purpose", Capacitance=13pF, Category=Capacitors, ComponentLink1Description=http://www.samsungsem.com/kr/front/downloadcms.do?path=/kr/support/product-search/mlcc/__icsFiles/afieldfile/2014/11/05&fileName=S_CL05C130JB5NNNC.pdf, ComponentLink1URL=http://www.samsungsem.com/kr/front/downloadcms.do?path=/kr/support/product-search/mlcc/__icsFiles/afieldfile/2014/11/05&fileName=S_CL05C130JB5NNNC.pdf, Features=-, Height - Seated (Max)=-, Lead Spacing=-, Lead Style=-, Mounting Type="Surface Mount, MLCC", Packaging="Cut Tape (CT)", Pricing 1="1=0.14, 10=0.064, 25=0.0448, 100=0.0291, 500=0.02032, 1000=0.01583, 2500=0.01425, 5000=0.01319 (CAD)", RoHS="RoHS Compliant", Size / Dimension="0.039\" L x 0.020\" W (1.00mm x 0.50mm)", Stock 1=16490, Supplier 1=Digi-Key, Thickness (Max)="0.022\" (0.55mm)"
C24: library part 2.2uF_35V_0603, "CAP CER 2.2UF 35V 10% X5R 0603", Capacitance=2.2µF, Manufacturer="Murata Electronics North America", Manufacturer Part Number=GRM188R6YA225KA12D, Operating Temperature="-55°C ~ 85°C", Package / Case="0603 (1608 Metric)", Ratings=-, Supplier Part Number 1=490-7204-1-ND, Temperature Coefficient=X5R, Tolerance=±10%, Voltage - Rated=35V, Applications="General Purpose", Category=Capacitors, ComponentLink1Description=http://www.murata.com/~/media/webrenewal/support/library/catalog/products/capacitor/mlcc/c02e.ashx, ComponentLink1URL=http://www.murata.com/~/media/webrenewal/support/library/catalog/products/capacitor/mlcc/c02e.ashx, Features=-, Height - Seated (Max)=-, Lead Spacing=-, Lead Style=-, Mounting Type="Surface Mount, MLCC", Packaging="Cut Tape (CT)", Pricing 1="1=0.31, 10=0.214, 50=0.1298, 100=0.109, 250=0.08832, 500=0.07792, 1000=0.06624 (CAD)", RoHS="RoHS Compliant", Size / Dimension="0.063\" L x 0.031\" W (1.60mm x 0.80mm)", Stock 1=55248, Supplier 1=Digi-Key, Thickness (Max)="0.031\" (0.80mm)"
D1 D2: library part "TOPLED 0803", "LED TOPLED 630NM SUP RED CLR SMD", Color=Red, Current - Test=2mA, Luminous Flux @ Current - Test="25 mlm", Manufacturer="OSRAM Opto Semiconductors Inc", Manufacturer Part Number="LS M67K-H2L1-1-Z", Millicandela Rating=8.78mcd, Package / Case="2-SMD, J-Lead", Supplier Part Number 1=475-2510-1-ND, Voltage - Forward (Vf) (Typ)=1.8V, Category=Optoelectronics, ComponentLink1Description=http://media.digikey.com/pdf/Data%20Sheets/Osram%20PDFs/LS,LO,LY_M67K.pdf, ComponentLink1URL=http://media.digikey.com/pdf/Data%20Sheets/Osram%20PDFs/LS,LO,LY_M67K.pdf, Height=1.30mm, Lens Style/Size="Rectangle with Flat Top, 1.5mm x 1mm", Lens Type=Clear, Mounting Type="Surface Mount", Packaging="Cut Tape (CT)", Pricing 1="1=0.19, 10=0.162, 100=0.1295, 250=0.11328, 500=0.10354 (CAD)", RoHS="RoHS Compliant", Size / Dimension="2.20mm L x 1.40mm W", Stock 1=23262, Supplier 1=Digi-Key, Viewing Angle=120°, Wavelength - Dominant=630nm, Wavelength - Peak=643nm
F1: library part 40O_550mA_0402, "FERRITE CHIP 40 OHM 550MA 0402", DC Resistance (DCR)="120 mOhm Max", Impedance @ Frequency="40 Ohm @ 100MHz", Manufacturer="TDK Corporation", Manufacturer Part Number=MMZ1005Y400CT000, Package / Case="0402 (1005 Metric)", Supplier Part Number 1=445-2150-1-ND, Category=Filters, ComponentLink1Description=http://product.tdk.com/emc/beads/en/documents/beads_commercial_signal_mmz_en.pdf, ComponentLink1URL=http://product.tdk.com/emc/beads/en/documents/beads_commercial_signal_mmz_en.pdf, Current Rating=550mA, Filter Type="Differential Mode - Single", Height (Max)="0.022\" (0.55mm)", Mounting Type="Surface Mount", Packaging="Cut Tape (CT)", Pricing 1="1=0.14, 10=0.099, 100=0.059, 250=0.04284, 500=0.03928, 1000=0.03393, 5000=0.02679 (CAD)", RoHS="RoHS Compliant", Size / Dimension="0.039\" L x 0.020\" W (1.00mm x 0.50mm)", Stock 1=1706, Supplier 1=Digi-Key
L1: library part "Ferrite_200 ohms_2A", "FILTER CHIP 220 OHM 2A 0603", Current Rating=2A, DC Resistance (DCR)="50 mOhm Max", Impedance @ Frequency="220 Ohm @ 100MHz", Manufacturer="Murata Electronics North America", Manufacturer Part Number=BLM18EG221SN1D, Package / Case="0603 (1608 Metric)", Supplier Part Number 1=490-3992-1-ND, Category=Filters, ComponentLink1Description=http://search.murata.co.jp/Ceramy/image/img/PDF/ENG/L0110S0101BLM18E.pdf, ComponentLink1URL=http://search.murata.co.jp/Ceramy/image/img/PDF/ENG/L0110S0101BLM18E.pdf, Filter Type="Differential Mode - Single", Height (Max)="0.037\" (0.95mm)", Mounting Type="Surface Mount", Packaging="Cut Tape (CT)", Pricing 1="1=0.33, 10=0.254, 50=0.1814, 100=0.1632, 250=0.13784, 500=0.12332, 1000=0.10519 (CAD)", RoHS="RoHS Compliant", Size / Dimension="0.063\" L x 0.031\" W (1.60mm x 0.80mm)", Stock 1=382631, Supplier 1=Digi-Key
P1: "Header, 5-Pin", LatestRevisionDate=17-Jul-2002, LatestRevisionNote="Re-released for DXP Platform.", Publisher="Altium Limited"
P2 P3 P4: library part 43650-0227, "Connector", Manufacturer_Name=Molex, Datasheet Link=https://www.molex.com/pdm_docs/sd/436500227_sd.pdf, Height=10.15mm, Manufacturer_Part_Number=43650-0227
P5: library part 105309-1106, "Connector", Manufacturer_Name=Molex, Datasheet Link=https://rs.componentsearchengine.com/Datasheets/2/105309-1106.pdf, Height=10.71mm, Manufacturer_Part_Number=105309-1106
P6 P7 P8: library part 1053091203, "No Description Available", Copyright="Copyright (C) 2021 Accelerated Designs. All rights reserved", Manufacturer_Part_Number=1053091203, RefDes=RefDes, SourceLibrary=Add_to_database_2021-01-18, Type=DEV, Vendor="Molex Connector Corporation"
P10: library part 1053141112, "No Description Available", Copyright="Copyright (C) 2018 Accelerated Designs. All rights reserved", Manufacturer_Part_Number=1053141112, RefDes=RefDes, SourceLibrary=Add_to_database_2021-01-18, Type=DEV, Vendor="Molex Connector Corporation"
R1: library part 1M_5%_1206, "RES SMD 1M OHM 5% 1/4W 1206", Manufacturer="Panasonic Electronic Components", Manufacturer Part Number=ERJ-8GEYJ105V, Operating Temperature="-55°C ~ 155°C", Package / Case="1206 (3216 Metric)", Power (Watts)="0.25W, 1/4W", Supplier Device Package=1206, Supplier Part Number 1=P1.0MECT-ND, Temperature Coefficient=±200ppm/°C, Tolerance=±5%, Category=Resistors, ComponentLink1Description=http://industrial.panasonic.com/www-cgi/jvcr13pz.cgi?E+PZ+3+AOA0001+ERJ8GEYJ105V+7+WW, ComponentLink1URL=http://industrial.panasonic.com/www-cgi/jvcr13pz.cgi?E+PZ+3+AOA0001+ERJ8GEYJ105V+7+WW, Composition="Thick Film", Features="Automotive AEC-Q200", Height="0.028\" (0.70mm)", Number of Terminations=2, Packaging="Cut Tape (CT)", Pricing 1="1=0.14, 50=0.038, 100=0.029, 250=0.02152, 500=0.01588, 1000=0.01059, 2500=0.00894 (CAD)", Resistance (Ohms)=1M, RoHS="RoHS Compliant", Size / Dimension="0.126\" L x 0.063\" W (3.20mm x 1.60mm)", Stock 1=165352, Supplier 1=Digi-Key
R2 R3 R4 R5 R6 R7: library part 10k_1%_0402, "RES SMD 10K OHM 1% 1/10W 0402", Manufacturer="Panasonic Electronic Components", Manufacturer Part Number=ERJ-2RKF1002X, Operating Temperature="-55°C ~ 155°C", Package / Case="0402 (1005 Metric)", Power (Watts)="0.1W, 1/10W", Supplier Device Package=0402, Supplier Part Number 1=P10.0KLCT-ND, Temperature Coefficient=±100ppm/°C, Tolerance=±1%, Category=Resistors, ComponentLink1Description=http://industrial.panasonic.com/www-cgi/jvcr13pz.cgi?E+PZ+3+AOA0002+ERJ2RKF1002X+7+WW, ComponentLink1URL=http://industrial.panasonic.com/www-cgi/jvcr13pz.cgi?E+PZ+3+AOA0002+ERJ2RKF1002X+7+WW, Composition="Thick Film", Features="Automotive AEC-Q200", Height="0.016\" (0.40mm)", Number of Terminations=2, Packaging="Cut Tape (CT)", Pricing 1="1=0.14, 50=0.0282, 100=0.0215, 250=0.01592, 500=0.01176, 1000=0.00784, 5000=0.00551 (CAD)", Resistance (Ohms)=10k, RoHS="RoHS Compliant", Size / Dimension="0.039\" L x 0.020\" W (1.00mm x 0.50mm)", Stock 1=5818216, Supplier 1=Digi-Key
R8 R9: library part 27_1%_0402, "RES SMD 27 OHM 1% 1/10W 0402", Manufacturer="Panasonic Electronic Components", Manufacturer Part Number=ERJ-2RKF27R0X, Operating Temperature="-55°C ~ 155°C", Package / Case="0402 (1005 Metric)", Power (Watts)="0.1W, 1/10W", Supplier Device Package=0402, Supplier Part Number 1=P27.0LCT-ND, Temperature Coefficient=±100ppm/°C, Tolerance=±1%, Category=Resistors, ComponentLink1Description=http://industrial.panasonic.com/www-cgi/jvcr13pz.cgi?E+PZ+3+AOA0002+ERJ2RKF27R0X+7+WW, ComponentLink1URL=http://industrial.panasonic.com/www-cgi/jvcr13pz.cgi?E+PZ+3+AOA0002+ERJ2RKF27R0X+7+WW, Composition="Thick Film", Features="Automotive AEC-Q200", Height="0.016\" (0.40mm)", Number of Terminations=2, Packaging="Cut Tape (CT)", Pricing 1="1=0.16, 50=0.0234, 100=0.0171, 250=0.01308, 500=0.01048, 1000=0.00771, 5000=0.00553 (CAD)", Resistance (Ohms)=27, RoHS="RoHS Compliant", Size / Dimension="0.039\" L x 0.020\" W (1.00mm x 0.50mm)", Stock 1=490131, Supplier 1=Digi-Key
R13 R14: library part 120_1%_0402, "RES SMD 120 OHM 1% 1/10W 0402", Manufacturer="Panasonic Electronic Components", Manufacturer Part Number=ERJ-2RKF1200X, Operating Temperature="-55°C ~ 155°C", Package / Case="0402 (1005 Metric)", Power (Watts)="0.1W, 1/10W", Supplier Device Package=0402, Supplier Part Number 1=P120LCT-ND, Temperature Coefficient=±100ppm/°C, Tolerance=±1%, Category=Resistors, ComponentLink1Description=http://industrial.panasonic.com/www-cgi/jvcr13pz.cgi?E+PZ+3+AOA0002+ERJ2RKF1200X+7+WW, ComponentLink1URL=http://industrial.panasonic.com/www-cgi/jvcr13pz.cgi?E+PZ+3+AOA0002+ERJ2RKF1200X+7+WW, Composition="Thick Film", Features="Automotive AEC-Q200", Height="0.016\" (0.40mm)", Number of Terminations=2, Packaging="Cut Tape (CT)", Pricing 1="1=0.14, 50=0.0282, 100=0.0215, 250=0.01592, 500=0.01176, 1000=0.00784, 5000=0.00551 (CAD)", Resistance (Ohms)=120, RoHS="RoHS Compliant", Size / Dimension="0.039\" L x 0.020\" W (1.00mm x 0.50mm)", Stock 1=184236, Supplier 1=Digi-Key
R27 R28 R29 R30 R31 R32: library part 10k_1%_0402, "RES SMD 10K OHM 1% 1/10W 0402", Manufacturer="Panasonic Electronic Components", Manufacturer Part Number=ERJ-2RKF1002X, Operating Temperature="-55°C ~ 155°C", Package / Case="0402 (1005 Metric)", Power (Watts)="0.1W, 1/10W", Resistance (Ohms)=10k, Supplier Device Package=0402, Supplier Part Number 1=P10.0KLCT-ND, Temperature Coefficient=±100ppm/°C, Tolerance=±1%, Category=Resistors, ComponentLink1Description=http://industrial.panasonic.com/www-cgi/jvcr13pz.cgi?E+PZ+3+AOA0002+ERJ2RKF1002X+7+WW, ComponentLink1URL=http://industrial.panasonic.com/www-cgi/jvcr13pz.cgi?E+PZ+3+AOA0002+ERJ2RKF1002X+7+WW, Composition="Thick Film", Features="Automotive AEC-Q200", Height="0.016\" (0.40mm)", Number of Terminations=2, Packaging="Cut Tape (CT)", Pricing 1="1=0.14, 50=0.0282, 100=0.0215, 250=0.01592, 500=0.01176, 1000=0.00784, 5000=0.00551 (CAD)", RoHS="RoHS Compliant", Size / Dimension="0.039\" L x 0.020\" W (1.00mm x 0.50mm)", Stock 1=5818216, Supplier 1=Digi-Key
U1: "500 mA, Low Voltage, Low Quiescent Current LDO Regulator", Current - Limit (Min)=-, Current - Output=500mA, Manufacturer="Microchip Technology", Operating Temperature="-40°C ~ 125°C", Package / Case="TO-261-4, TO-261AA", Supplier Device Package=SOT-223-3, Supplier Part Number 1=MCP1825S-3302E/DB-ND, Voltage - Dropout (Typical)="0.21V @ 500mA", Voltage - Input="Up to 6V", Voltage - Output=3.3V, Category="Integrated Circuits (ICs)", ComponentLink1Description=http://www.microchip.com/mymicrochip/filehandler.aspx?ddocname=en531698, ComponentLink1URL=http://www.microchip.com/mymicrochip/filehandler.aspx?ddocname=en531698, Manufacturer Part Number=MCP1825S-3302E/DB, Mounting Type="Surface Mount", Number of Regulators=1, Packaging=Tube, Pricing 1="1=0.61, 10=0.51, 25=0.43, 100=0.39 (USD)", Regulator Topology="Positive Fixed", RoHS="RoHS Compliant", Stock 1=5172, Supplier 1=Digi-Key
U2: "Tiva TM4C123GH6PM Microcontroller ARM Cortex 80 MHz FPU", Supplier Part Number 1=296-35848-ND, Supplier 1=Digi-Key
U3: library part FT230XQ-R, "IC USB SERIAL BASIC UART 16QFN", Current - Supply=8mA, Manufacturer="FTDI, Future Technology Devices International Ltd", Operating Temperature="-40°C ~ 85°C", Package / Case="16-WQFN Exposed Pad", Supplier Device Package="16-QFN (4x4)", Supplier Part Number 1=768-1130-1-ND, Voltage - Supply="3.3 V ~ 5 V", Category="Integrated Circuits (ICs)", ComponentLink1Description=http://www.ftdichip.com/Support/Documents/DataSheets/ICs/DS_FT230X.pdf, ComponentLink1URL=http://www.ftdichip.com/Support/Documents/DataSheets/ICs/DS_FT230X.pdf, Function="Bridge, USB to UART", Interface=UART, Manufacturer Part Number=FT230XQ-R, Packaging="Cut Tape (CT)", Pricing 1="1=2.64, 25=2.5508, 100=2.4601, 250=2.21412, 500=1.994, 1000=1.89042, 2500=1.86128 (CAD)", Protocol=USB, RoHS="RoHS Compliant", Standards="USB 2.0", Stock 1=7567, Supplier 1=Digi-Key
USB1: library part "MOLEX 0670688010", Supplier Part Number 1=WM4064-ND, Supplier 1=Digi-Key
X1: library part 403C35E16M00000, "CRYSTAL 16MHZ 20PF SMD", ESR (Equivalent Series Resistance)="80 Ohm", Frequency=16MHz, Frequency Stability=±50ppm, Frequency Tolerance=±30ppm, Load Capacitance=20pF, Manufacturer="CTS-Frequency Controls", Operating Mode=Fundamental, Operating Temperature="-20°C ~ 70°C", Package / Case="4-SMD, No Lead (DFN, LCC)", Ratings=-, Supplier Part Number 1=CTX1293CT-ND, Category="Crystals and Oscillators", ComponentLink1Description=http://www.ctscorp.com/components/Datasheets/008-0288-0_F.pdf, ComponentLink1URL=http://www.ctscorp.com/components/Datasheets/008-0288-0_F.pdf, Height="0.031\" (0.80mm)", Manufacturer Part Number=403C35E16M00000, Mounting Type="Surface Mount", Packaging="Cut Tape (CT)", Pricing 1="1=1.07, 10=0.95, 50=0.8866, 100=0.7847, 500=0.7415, 750=0.70228, 1000=0.61988 (CAD)", RoHS="RoHS Compliant", Size / Dimension="0.126\" L x 0.098\" W (3.20mm x 2.50mm)", Stock 1=7029, Supplier 1=Digi-Key, Type="MHz Crystal"

## Free pads (board coordinates)
  round 60 hole 75: 2(2260,4665) 3(2260,1690) 4(5697.91,4665) 5(5697.91,1690)

## Via types
v1: diameter 25, hole 12, Top Layer to Bottom Layer, 50 vias

## Nets (pads, with @x,y where several pads share a name; then routed paths per layer and width w, separated by ;. In a path a pad name is that pad's centre, name@x,y a point inside that pad or via, vN(x,y) a via of type N, cw(c..) or ccw(c..) an arc to the next point about the centre after c; other vN are vias at no path point)
+3.3V: C10.1 C11.1 C12.1 C13.2 C14.2 C15.2 C16.2 C17.2 C20.2 C28.2 C29.2 F1.1 R2.1 R3.1 R4.2 R5.2 R6.2 R7.2 R13.2 R14.2 R27.2 R28.2 R29.2 R30.2 R31.2 R32.2 U1.3 U2.11 U2.26 U2.37 U2.42 U2.54 U3.1 U3.8 U3.9 U3.10 | length 3734.6
  Top Layer w12: C20.2 2680,3010 2625,3065 2625,3135 F1.1 v1(2800,3135) R2.1@2870,3135 ; C16.2@3200,2939.72 U2.54 ; v1(3560,2525) C17.2 3636.89,2531.89 3716.96,2611.96 3716.96,2666.96 U2.11@3720,2670 ; C15.2@3600,3215 3600,3185 v1(3615,3170) 3640,3145 U2.42 ; U2.37 3738.43,3143.43 3800,3205 v1(3810,3205) 3825,3220 C14.2@3885,3220 ; v1@3745,2325 R14.2 3753.85,2262.72 3766.57,2250 3878.43,2250 3901.15,2227.28 R7.2 ; U2.26 v1(3955,2920) ; v1(3900,2375) 3895,2375 3905,2365 R5.2@3905,2340 ; v1@3902.72,3347.72 R3.1 ; v1@4031.61,2388.39 U3.1 ; v1(4065,2530) R6.2@4065,2585 ; U3.8 U3.9 U3.10 4282.8,2337.2 v1(4285,2335) ; v1(4235,2520) R4.2 ; v1(4305,2580) 4360,2580 4360.34,2580.34 C29.2 4363.78,2583.11 C28.2 ; R13.2 v1(4500,2550) ; v1(4840,3180) 5095,3180 R32.2@5105,3170 ; v1(5020,1898.23) 5116.26,1898.23 C12.1 ; R27.2 R28.2 R29.2 R30.2 R31.2 R32.2 ; C10.1@5115,1880 5115,1815 5125,1805 C13.2 ; v1(5305,1933.11) 5346.34,1974.45 U1.3
  other v1: 3745,2330 4030,2390 3265,2940 3900,3345
+5V: C4.2 C5.2 C6.2 C7.1 C8.1 C9.2 L1.2 P5.1 P5.2 U1.1 | length 4168.7
  Top Layer w25: C6.2@2480,2410 C6.2@2483.11,2406.89 ; 2498.11,2406.89 C5.2 ; C5.2@2635,2410 2638.11,2406.89 C4.2 2828.11,2406.89 L1.2@2945,2290 ; v1(2735,2315) 2735,2345 C4.2@2795,2405 ; v1@5395,2245 5419.64,2220.36 U1.1 ; v1(5395,2250) C8.1@5395,2445 ; C8.1 5397.84,2487.84 5415,2505 5585,2505 5595,2495 C9.2@5595,2460
  Bottom Layer w25: v1(2735,2315) 2787.28,2262.72 4292.72,2262.72 4780,2750 4780,3190 4885,3295 v1(5000,3295)
+24V: P2.2 P3.2 P4.2 P9.4 P9.5 P9.6
+A3.3V: C21.2 C22.2 C23.2 F1.2 U2.2 | length 1652.4
  Top Layer w8: F1.2@2589.88,3134.88 F1.2@2590,3135
  Top Layer w12: C23.2 F1.2@2589.88,3134.88 ; C23.2@2590,2978.38 2590,2816.37 C22.2 C21.2 2591.89,2548.11 2625,2515 v1(3010,2515) ; v1@3515,2580 3541.57,2606.57 U2.2
  Bottom Layer w12: v1(3010,2515) 3445,2515 v1(3510,2580)
DIR_A: P6.3 U2.29 | length 2155.6
  Top Layer w8: U2.29@3885,2980 4039.8,2980 5430,4370.2 P6.3
DIR_B: P7.3 U2.30 | length 1909.5
  Top Layer w8: U2.30@3890,3000 4030,3000 4910,3880 P7.3
DIR_C: P8.3 U2.31 | length 1671.1
  Top Layer w8: U2.31@3890,3020 4020,3020 4396.85,3396.85 P8.3
DM: R8.1 USB1.2 | length 1647.3
  Top Layer w8: v1(3745,2045) 3810,1980 4185,1980 4205,2000 R8.1@4205,2035
  Bottom Layer w8: USB1.2@2780,2085 2780,2080 2975,1885 3145,1885 3305,2045 v1(3745,2045)
DP: R9.1 USB1.3 | length 1649
  Top Layer w8: v1(3800,2045) 3825,2020 4125,2020 R9.1@4140,2035
  Bottom Layer w8: USB1.3@2700,2080 2700,2120 2715,2135 2795,2135 2990,1940 3120,1940 3251.5,2071.5 3773.5,2071.5 v1(3800,2045)
"ENC PWM A": P5.3 U2.57 | length 3398.2
  Top Layer w8: v1(3285,2470) 3300,2485 3300,2845 3335.1,2880.1 U2.57
  Bottom Layer w8: v1(3285,2470) 3350,2405 3895,2405 3900,2410 5055,3565 P5.3@5630,3565
"ENC PWM B": P5.4 U2.61 | length 3187.6
  Top Layer w8: v1(3375,2470) 3375,2775 3401.93,2801.93 U2.61
  Bottom Layer w8: v1(3375,2470) 3425,2420 3885,2420 5125,3660 5630,3660 P5.4@5635,3665
GND: C1.2 C2.1 C3.1 C4.1 C5.1 C6.1 C7.2 C8.2 C9.1 C10.2 C11.2 C12.2 C13.1 C14.1 C15.1 C16.1 C17.1 C18.1 C19.1 C20.1 C21.1 C22.1 C23.1 C24.1 C25.1 C26.1 C27.1 C28.1 C29.1 P1.1 P2.1 P3.1 P4.1 P5.5 P5.6 P6.1 P7.1 P8.1 P9.1 P9.2 P9.3 P10.1 P10.2 P10.3 P10.4 P10.5 P10.6 R1.1 U1.2 U1.4 U2.3 U2.12 U2.27 U2.32 U2.34 U2.35 U2.39 U2.55 U3.3 U3.13 U3.17 USB1.4 X1.2 X1.4 | length 5659.5
  Top Layer w8: v1(2410,2445) C4.1@2800,2445 ; C21.1 C22.1 2628.11,2957.59 C23.1 2739.48,2974.48 2750,2985 C20.1@2750,3010 ; v1(2630,2595) C21.1@2630,2665 ; C2.1 R1.1 v1@3197.83,1692.83 ; v1(3010,2585) C24.1 3082.44,2637.44 3090,2645 C26.1@3090,2775 ; C1.2 3095,2085 3095,2135 3050,2180 C3.1 ; C16.1@3195,2905 3200,2910 3205,2905 v1(3265,2905) ; v1@3270,2905 3285.04,2920.04 U2.55 ; v1@3561.26,2563.74 U2.3 ; C15.1 3600,3260 3565,3295 3565,3340 3570,3345 C19.1@3600,3345 ; C19.1 3600,3365 v1(3660,3425) 3710,3425 3730,3405 X1.2@3730,3306.61 ; X1.4@3667.01,3220 3667.01,3247.01 3727.36,3304.12 X1.2@3730,3306.61 ; C17.1@3675,2525 v1(3715,2525) 3720,2525 3740,2545 U2.12@3740,2669.45 ; U2.39 3699.06,3075.63 3714.69,3060 3750.72,3060 3777.8,3087.08 U2.35 U2.34 3797.48,3137.48 v1(3835,3175) 3841.89,3181.89 C14.1 ; C18.1@3785,3305 3783.39,3306.61 X1.2@3730,3306.61 ; U2.32@3885,3037.87 3927.13,3037.87 3950,3060.74 v1(3950,3135) ; U2.27 3866.09,2939.72 3849.64,2956.18 3849.64,3025.23 3862.56,3038.15 U2.32 ; v1@3903.11,3256.89 C27.1 ; U3.3 4128.08,2337.2 U3.17@4134.68,2330.6 ; U3.17@4155,2350 4193.39,2388.39 U3.13 4259.8,2424.8 4396.89,2561.89 C29.1 4400,2583.11 C28.1 ; C12.2 5225.98,2245.39 C11.2 ; C13.1 5210,1805 5225,1820 C10.2@5225,1915 ; C10.2@5223.82,1915 5223.82,2102.83 C11.2 ; C7.2@5500,2330 5502.17,2332.17 C8.2 5535,2445 5560,2420 5595,2420 v1(5595,2260) ; v1@5590,2260 5647.99,2202.01 U1.4 ; U1.4@5676.93,2093.94 U1.4 ; C11.2 5379.64,2105 U1.2 U1.4
  other v1: 3200,1690 3560,2565 3900,3260
NetD1_1: D1.1 R13.1 | length 112.1
  Top Layer w8: D1.1 4475,2439.57 R13.1
NetD2_1: D2.1 R14.1 | length 253.9
  Top Layer w8: R14.1 3752.72,2227.28 3920,2060 D2.1@3929.6,2060
NetR6_1: R6.1 U3.16 | length 162.1
  Top Layer w8: R6.1 4116.61,2563.39 U3.16
NetR7_1: R7.1 U3.4 | length 190.5
  Top Layer w8: R7.1 3958.9,2311.61 U3.4
NetR8_2: R8.2 U3.7 | length 213
  Top Layer w8: U3.7@4170,2270 4170,2110 R8.2@4207.5,2072.5
NetR9_2: R9.2 U3.6 | length 201.1
  Top Layer w8: R9.2@4140,2075 4142.2,2077.2 U3.6
NO1: P10.7 R27.1 U2.58 | length 4193.5
  Top Layer w8: U2.58 3350,2860 3345.5,2860 3317.87,2832.37 3317.87,2427.33 3379,2366.2 3379,2061.6 3615.6,1825 v1(4470,1825) ; R27.1@5145,2680 5140,2675 5140,2650 5185,2605 5325,2605 5404.72,2684.72 P10.7
  Bottom Layer w8: v1(4470,1825) 4820,1825 5595,2600 P10.7@5595,2680
NO2: P10.8 R28.1 U2.59 | length 4108.5
  Top Layer w8: U2.59@3450,2840 3360.13,2840 3334.5,2814.7 3334.5,2430.5 3393,2372 3393,2067.4 3615.4,1845 4315,1845 4340,1870 v1(4470,1870) ; R28.1@5132.72,2785 R28.1 P10.8@5590,2785
  Bottom Layer w8: v1(4470,1870) 4795,1870 5535,2610 5535,2735 P10.8@5590,2790
NO3: P10.9 R29.1 U2.60 | length 4098.8
  Top Layer w8: U2.60 3371.61,2821.61 3348.5,2798.5 3348.5,2441.5 3407,2383 3407,2073.2 3616.2,1864 4304,1864 4355,1915 v1@4462.5,1915 ; R29.1@5137.72,2880 R29.1 P10.9@5595,2880
  Bottom Layer w8: v1(4470,1915) 4775,1915 5490,2630 5490,2785 5590,2885 P10.9@5595,2885
NO4: P10.10 R30.1 U2.62 | length 4026.6
  Top Layer w8: U2.62 3450.04,2778.47 3413.67,2778.47 3411.5,2776.3 3411.3,2776.3 3393.7,2758.7 3393.7,2501.3 3421,2474 3421,2079 3616,1884 4294,1884 4370,1960 v1(4470,1960) ; R30.1 P10.10
  Bottom Layer w8: v1(4470,1960) 4760,1960 5445,2645 5445,2835 P10.10@5590,2980
NO5: P10.11 R31.1 U2.63 | length 4032.1
  Top Layer w8: U2.63@3450,2760 3417.28,2760 3415.43,2758.16 3415.43,2504.57 3435,2485 3435,2084.8 3614.8,1905 4285,1905 4385,2005 v1(4470,2005) ; R31.1 5595,3075 P10.11@5600,3080
  Bottom Layer w8: v1(4470,2005) 4740,2005 5395,2660 5395,2885 5585,3075 P10.11@5600,3075
NO6: P10.12 R32.1 U2.64 | length 4033.2
  Top Layer w8: U2.64 3450.04,2665.04 3450,2665 3450,2089.6 3614.6,1925 4275,1925 4400,2050 v1(4470,2050) ; R32.1 5230,3170 5275,3125 5350,3125 5405,3180 P10.12@5595,3180
  Bottom Layer w8: v1(4470,2050) 4725,2050 5260,2585 5260,2850 5585,3175 P10.12@5595,3175
OSC0: C18.2 U2.40 X1.1 | length 204.7
  Top Layer w8: U2.40@3679.06,3110 3679.06,3164.06 3730,3215 3730,3220 3740,3220 C18.2@3785,3265
OSC1: C19.2 U2.41 X1.3 | length 285
  Top Layer w8: C19.2 3658.11,3311.89 X1.3@3665,3305 ; 3629.8,3199.8 3660,3169.61 U2.41@3660,3115 ; 3630,3200 3630,3274.61 X1.3
PWM_A: P6.2 U2.23 | length 2351.6
  Top Layer w8: U2.23 4049.02,2860.98 v1(4110,2800)
  Bottom Layer w8: v1(4110,2800) 5330,4020 P6.2@5330,4400
PWM_B: P7.2 U2.24 | length 2036.6
  Top Layer w8: U2.24 v1@4110.67,2880.67
  Bottom Layer w8: v1(4110,2880) 4810,3580 P7.2@4810,4405
PWM_C: P8.2 U2.28 | length 1739.1
  Top Layer w8: U2.28 v1@4109.41,2959.41
  Bottom Layer w8: v1(4110,2960) 4300,3150 P8.2@4300,4400
RESET: C27.2 R3.2 U2.38 | length 360.2
  Top Layer w8: U2.38@3718.43,3125 3718.43,3158.43 C27.2@3866.89,3306.89 ; C27.2 C27.2@3866.89,3306.89 ; C27.2@3867.28,3307.28 C27.2@3866.89,3306.89 ; R3.2@3870,3420 3866.89,3416.89 C27.2@3866.89,3306.89
SHIELD: C2.2 R1.2 USB1.5 USB1.6 | length 1010.7
  Top Layer w20: USB1.5 2990.98,1795.98 C2.2@2995,1800 ; C2.2 R1.2
  Bottom Layer w20: USB1.5 USB1.6
TCK: P1.2 R2.2 U2.52 | length 865.2
  Top Layer w8: R2.2@2910,3130 2910,3000 2975,2935 3125,2935 3169.09,2979.09 U2.52 ; R2.2@2910,3135 P1.2
TDI: P1.4 U2.50 | length 396.9
  Top Layer w8: P1.4 3150,3035 3166.54,3018.46 U2.50
TDO: P1.3 U2.49 | length 409.4
  Top Layer w8: P1.3 3395,3085 3441.85,3038.15 U2.49
TMS: P1.5 U2.51 | length 402.8
  Top Layer w8: P1.5 3073.78,2998.78 U2.51
  Bottom Layer w8: P1.5 P1.5@3065,2980
"USB RX LED": D2.2 U3.5 | length 256.8
  Top Layer w8: D2.2@4016.22,2060 4016.22,2076.22 4116.61,2176.61 U3.5
"USB TX LED": D1.2 U3.11 | length 158.9
  Top Layer w8: U3.11 4263.8,2362.8 4264,2363 4388.38,2363 D1.2
USB_RX: R4.1 U2.17 U3.15 | length 788.8
  Top Layer w8: U2.17 3907.13,2742.87 4000,2650 v1(4000,2435) ; U3.15 4142.2,2572.2 v1@4150,2580 ; v1(4155,2580) R4.1 R4.1@4200,2580
  Bottom Layer w8: v1(4000,2435) 4020,2435 4155,2570 v1(4155,2580)
USB_TX: R5.1 U2.18 U3.2 | length 695.6
  Top Layer w8: U2.18 3910.52,2762.56 3913.08,2760 3924.93,2760 3965.43,2719.5 3965.5,2719.5 4035,2650 4035,2432.52 R5.1@3942.48,2340 ; R5.1@3935,2340 R5.1 R5.1@3942.48,2340 ; U3.2 4052.8,2362.8 4030,2340 R5.1@3942.48,2340